# Altium PCB TAUV-Regulated_Power_board.PcbDoc (part 1 of 2)
Units mil, origin at the board's own origin, x right, y up, seen from the top; angles counter-clockwise.
Board outline 4762.5 x 3417.5 mil, 6 copper layers (1-Top, 2-GND1, 3-Signal1, 4-Hi_PWR, 5-GND2, 6-Bottom), stack 32.112 mil thick; 171 components, 113 nets, 521 pads, 65 vias.
Unrouted connection lines stored in the file: 296.
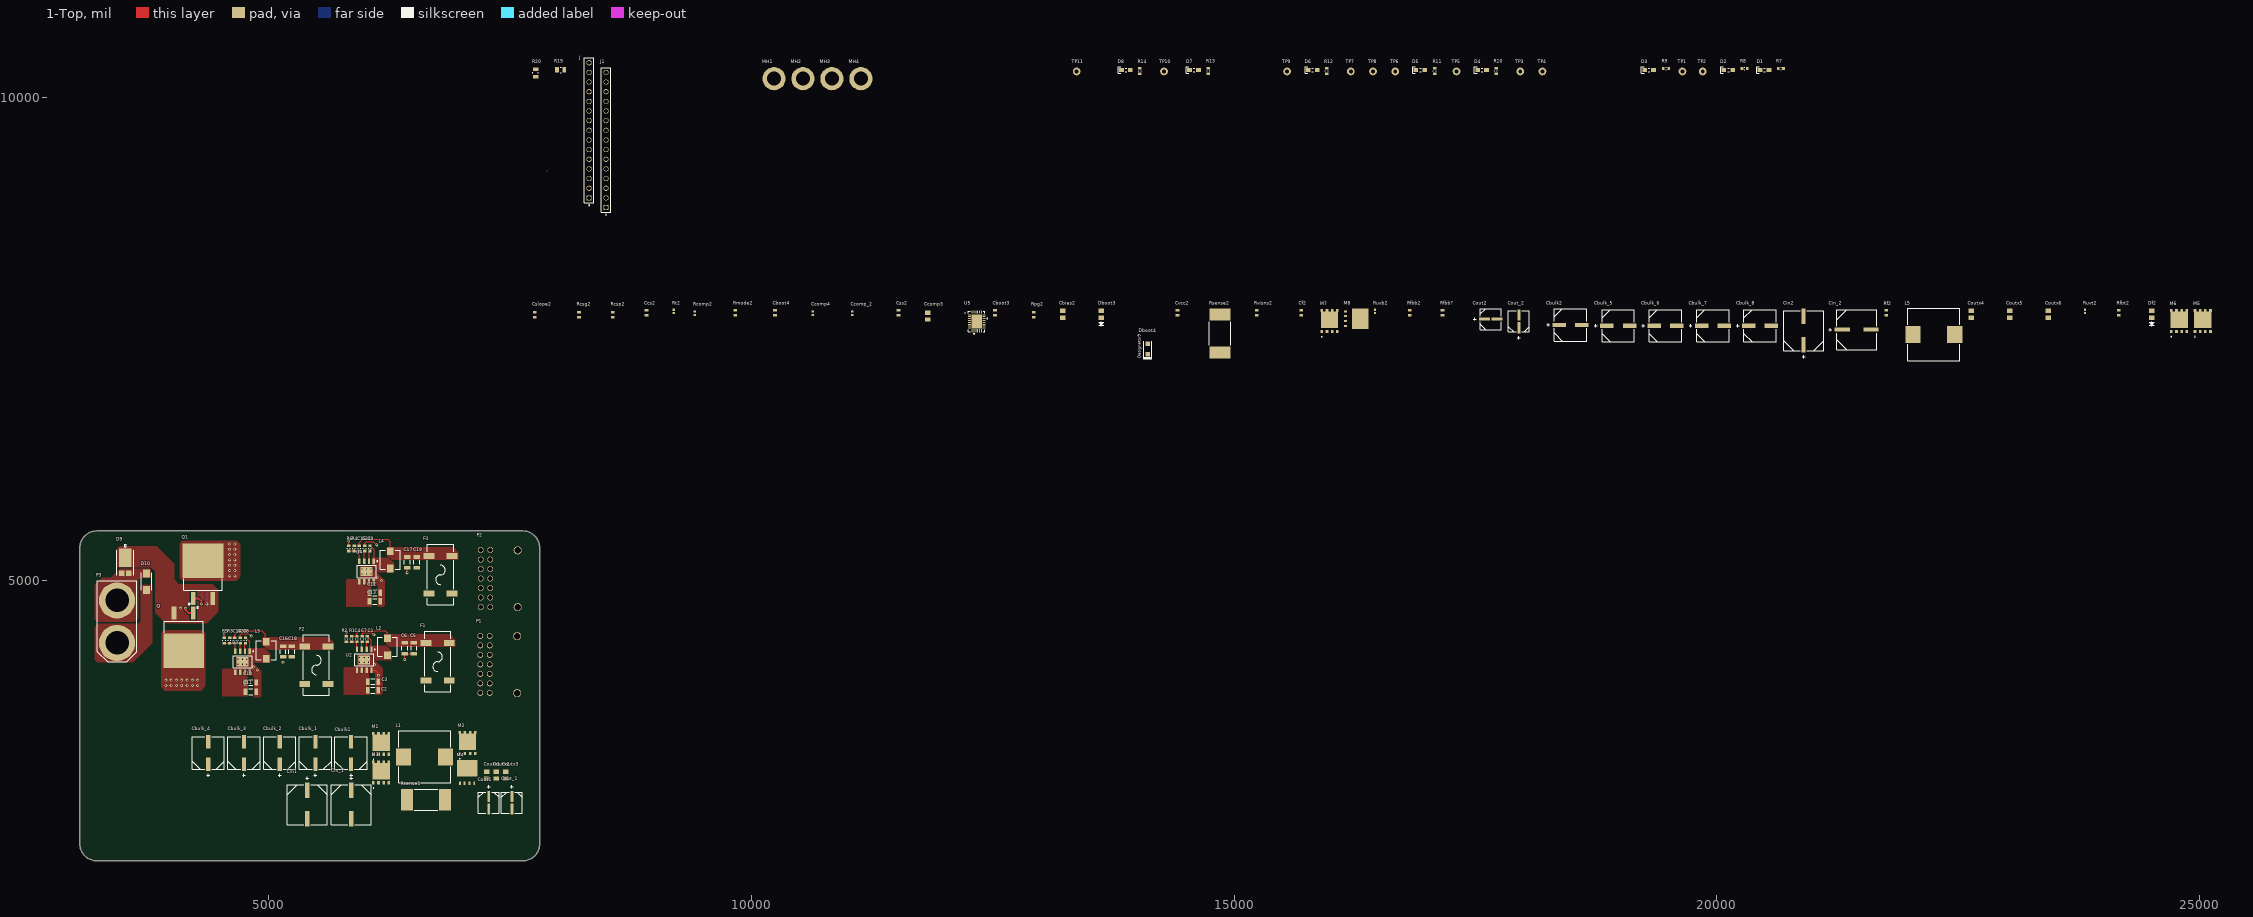
[diagram p0: 1-Top view]
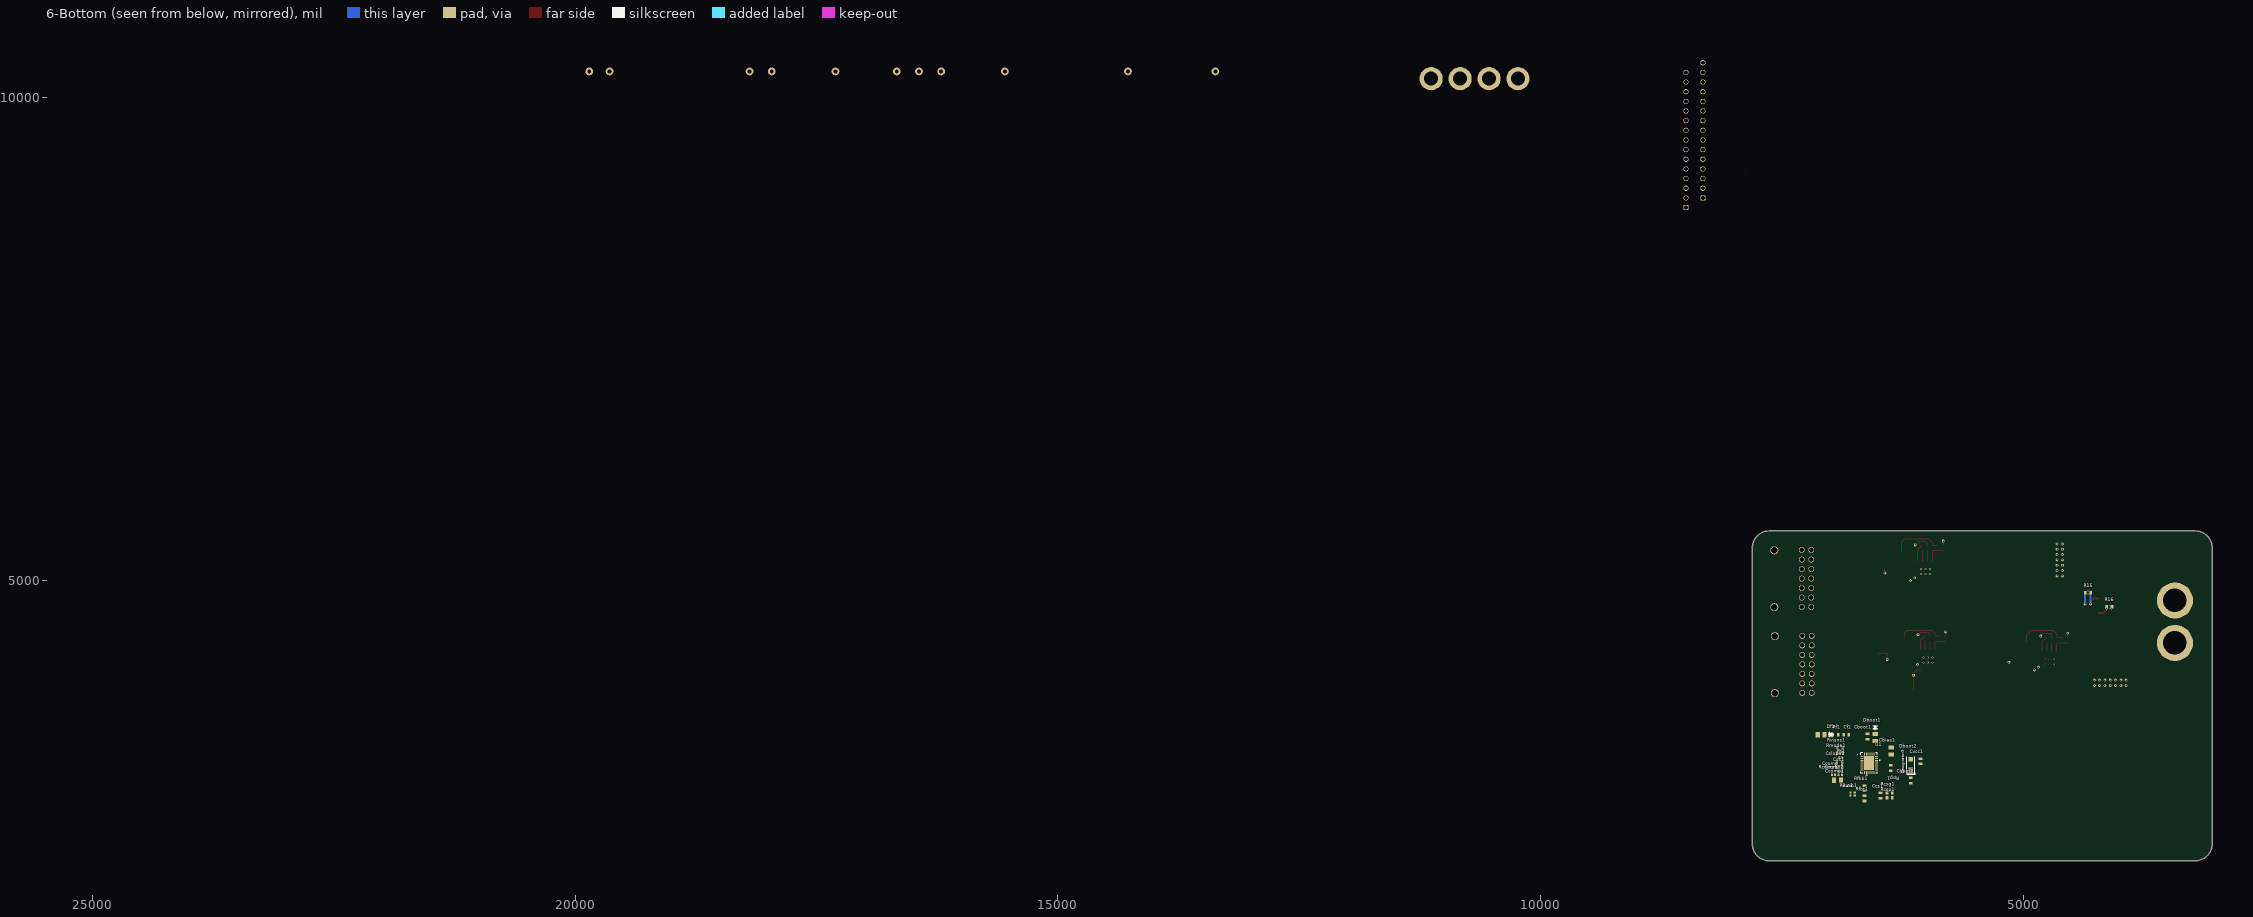
[diagram p1: 6-Bottom view, seen from below]
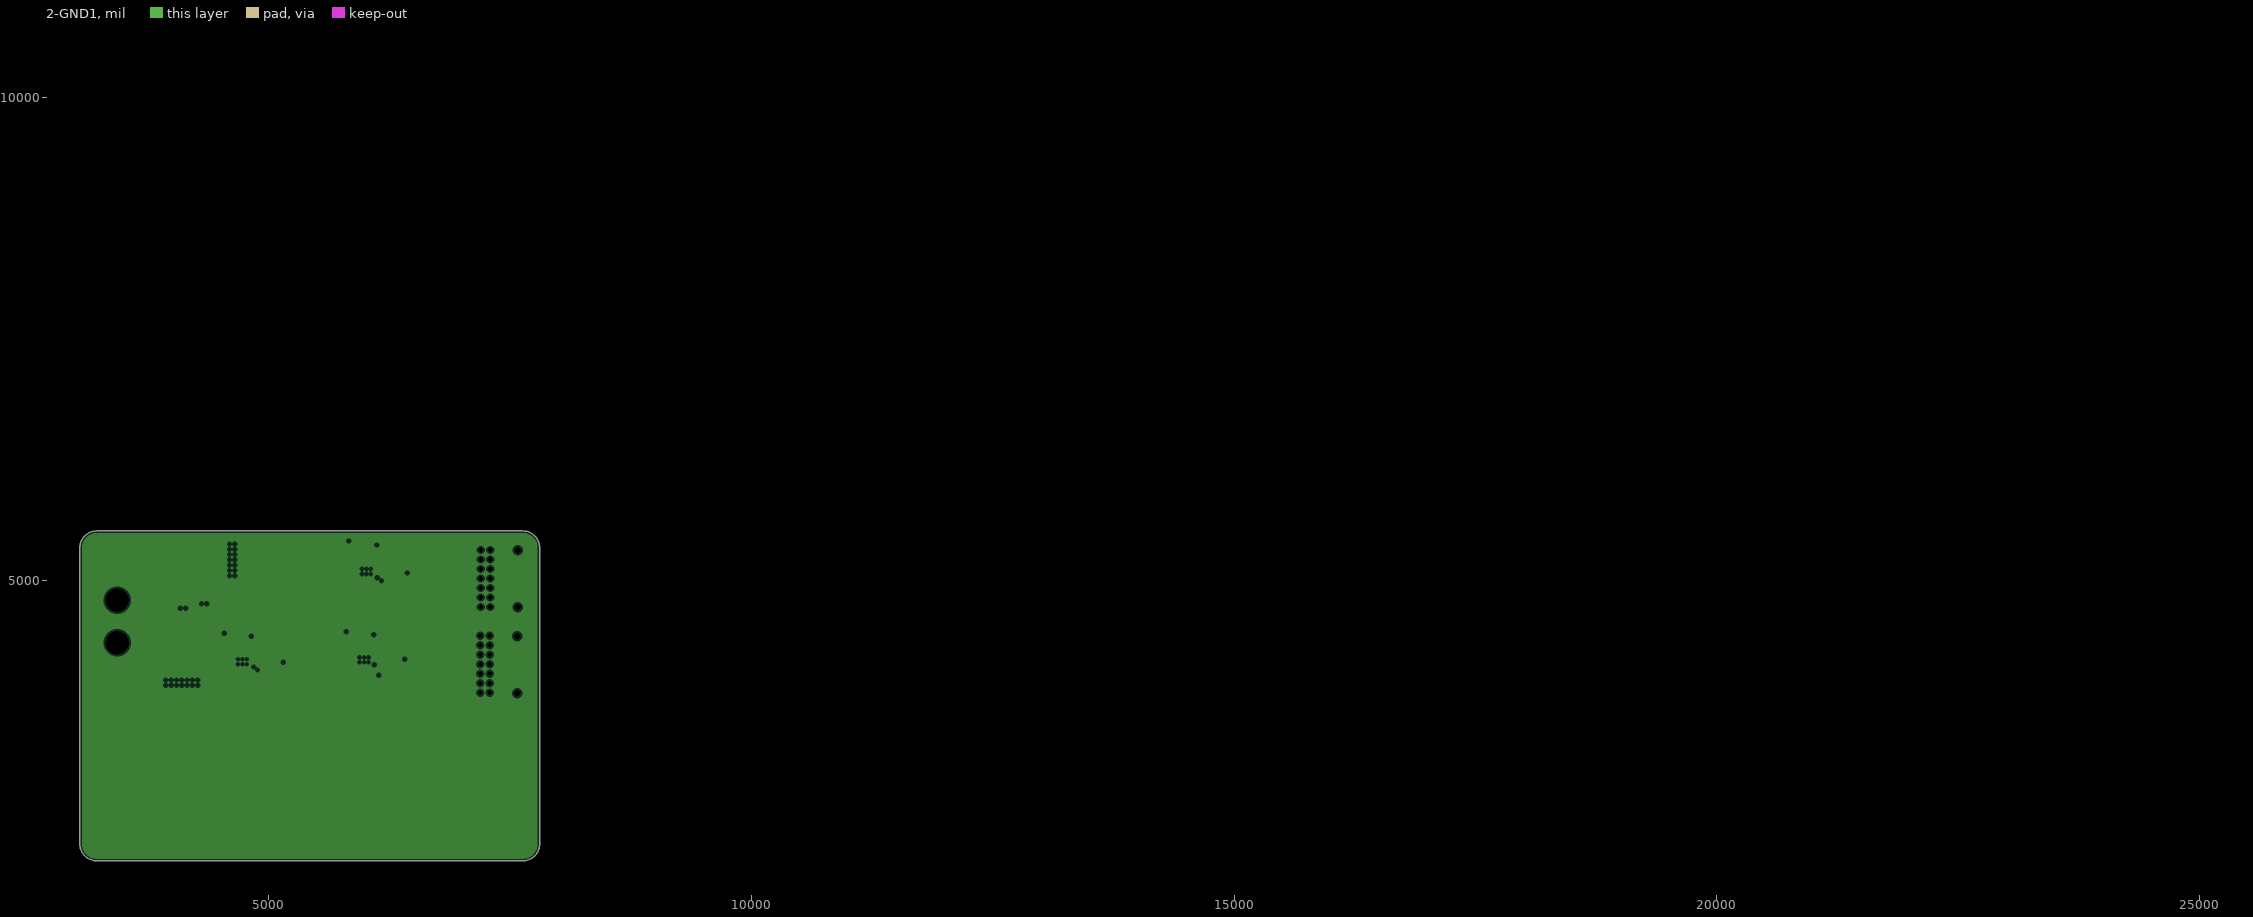
[diagram p2: 2-GND1, clearances drawn from the general rule]
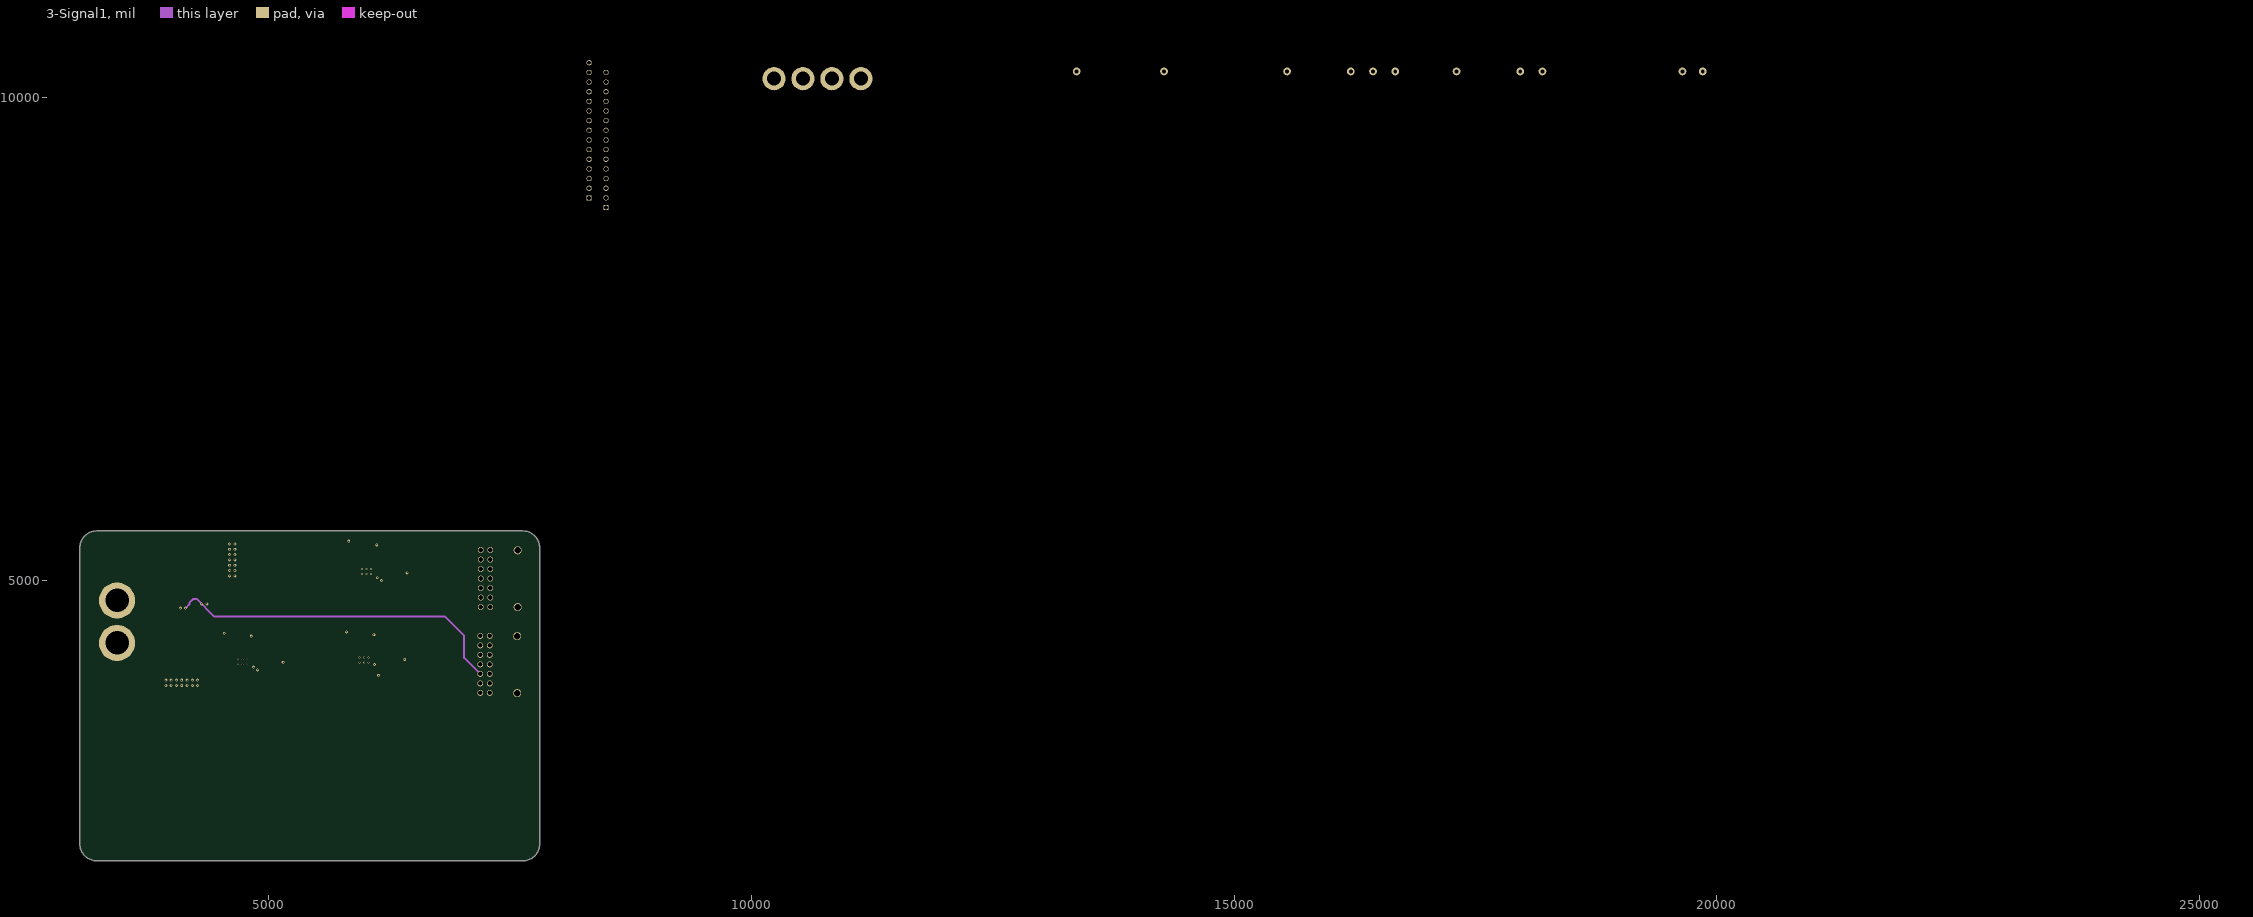
[diagram p3: 3-Signal1]
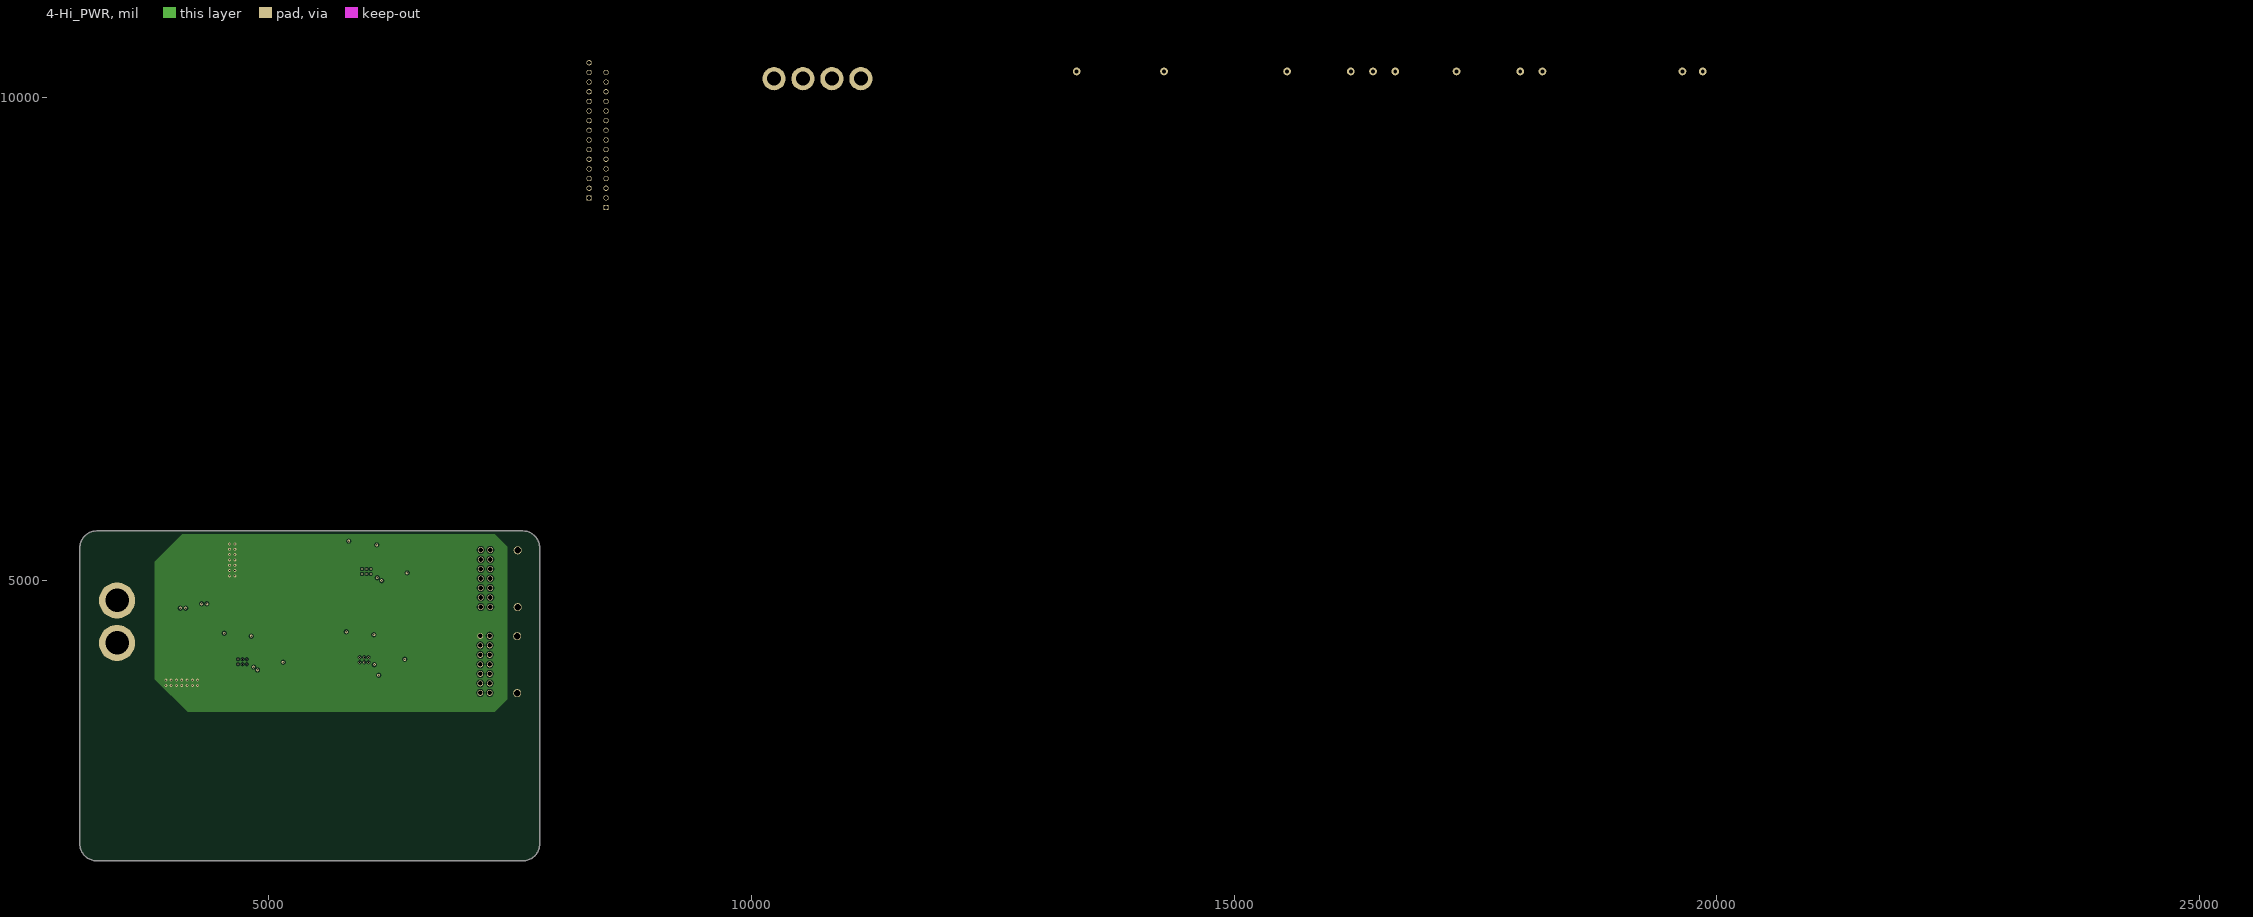
[diagram p4: 4-Hi_PWR]
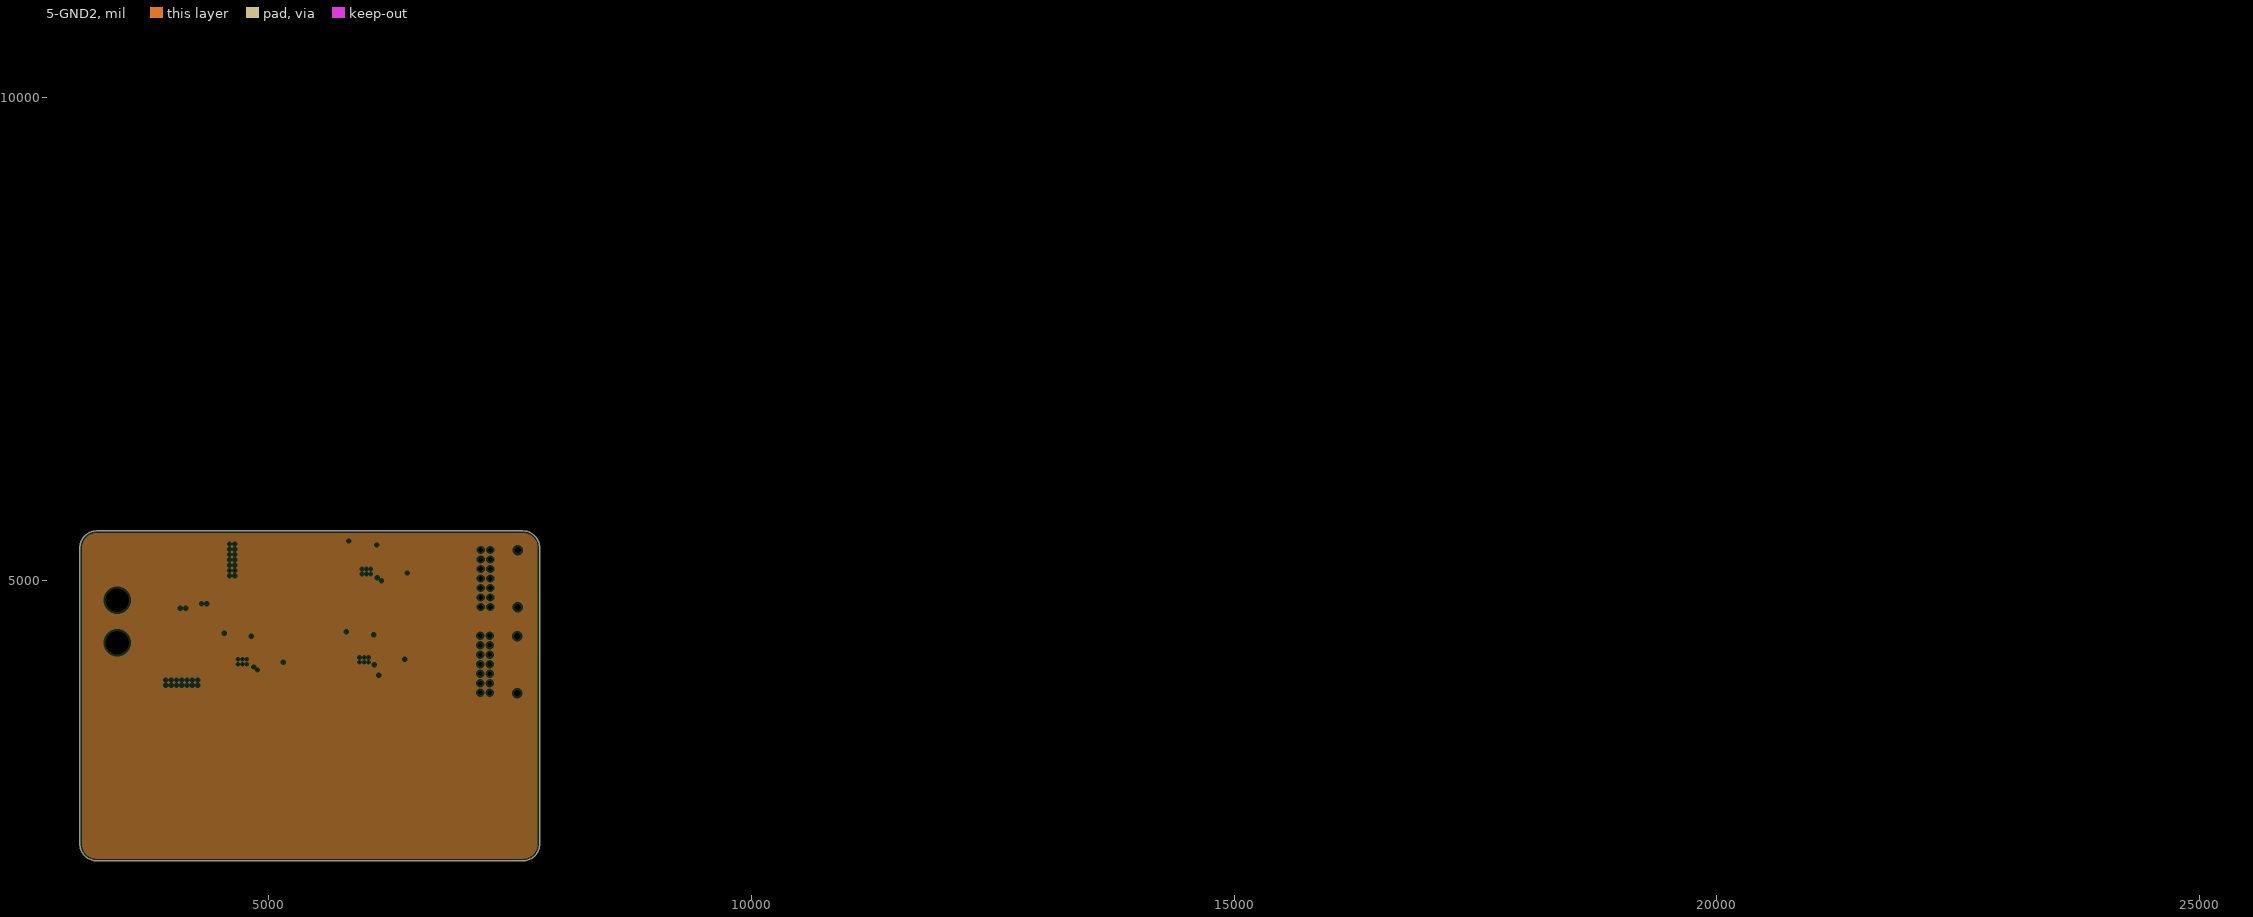
[diagram p5: 5-GND2, clearances drawn from the general rule]

## Layer stack, top to bottom
Top Solder: solder mask 0.4, Solder Resist, Dk 3.5
1-Top: signal copper 1.4
Dielectric 4: prepreg 2.8, PP-006, Dk 4.1
2-GND1: plane copper 1.378
Dielectric 2: prepreg 2.8, PP-006, Dk 4.1
3-Signal1: signal copper 1.378
Dielectric 1: dielectric 12.6, FR-4, Dk 4.8
4-Hi_PWR: signal copper 1.378
Dielectric 3: prepreg 2.8, PP-006, Dk 4.1
5-GND2: plane copper 1.378
Dielectric 5: prepreg 2.8, PP-006, Dk 4.1
6-Bottom: signal copper 1.4
Bottom Solder: solder mask 0.4, Solder Resist, Dk 3.5

## Board outline
3045,2267.5 3045,5335 cw(c3220,5335) 3220,5510 7632.5,5510 cw(c7632.5,5335) 7807.5,5335 7807.5,2267.5 cw(c7632.5,2267.5) 7632.5,2092.5 3220,2092.5 cw(c3220,2267.5)

## Design rules (kind name [scope] priority, off if disabled: settings)
Clearance [All] p1: gap=10 ignorepadtopadclearanceinfootprint=FALSE except(0: Arc-Hole Track-Hole SMDPad-Hole THPad-Hole Via-Hole Fill-Hole Poly-Hole Region-Hole Text-Hole)
PlaneClearance [All] p1: clearance=20
PlaneConnect [All] p1: planeconnectstyle=Relief reliefexpansion=20 reliefentries=4 reliefconductorwidth=10 reliefairgap=10
PolygonConnect [All] p1: connectstyle=Direct reliefconductorwidth=10 reliefentries=4 polygonreliefangle="90 Angle" airgapwidth=10
RoutingVias [All] p1: holewidth=28 width=50 viastyle="Through Hole" minholewidth=28 minwidth=50 maxholewidth=28 maxwidth=50
SolderMaskExpansion [All] p1: expansion=4 istentingtop=FALSE
Width [All] p1: maxlimit=100 minlimit=5 preferedwidth=10
28 further rules are at their usual default settings.

## Classes and differential pairs
component class Sht5-V12P0_Jetson: Cbias1 Cboot1 Cboot2 Cbulk1 Cbulk_1 Cbulk_2 Cbulk_3 Cbulk_4 Ccomp1 Ccomp2 Ccomp_1 Ccs1 Cf1 Cin1 Cin_1 Cout1 Cout_1 Coutx1 Coutx2 Coutx3 Cslope1 Css1 Cvcc1 Dboot1 Dboot2 Df1 L1 M1 M2 M3 M4 Rcomp1 Rcsg1 Rcsp1 Rf1 Rfbb1 Rfbt1 Rmode1 Rpg1 Rsense1 Rt1 Ruvb1 Ruvt1 Rvisns1 U1
net class Sht3-Regulators_Nets: GND NetC1_1 NetC1_2 NetC4_1 NetC4_2 NetC7_2 NetC8_1 NetC8_2 NetC9_1 NetC9_2 NetC14_1 NetC14_2 NetC15_1 NetC15_2 NetC20_2 NetC21_2 V3P3 V5P0 V5P0_Servo VCC_BATT_FILT
net class U5_Nets: 11 26 27 32 33 34 GND NetCbias2_1 NetCboot3_1 NetCboot4_1 NetCcomp3_1 NetCcs2_1 NetCcs2_2 NetCf2_1 NetCslope2_1 NetCss2_1 NetCvcc2_1 NetRfbb2_1 NetRmode2_1 NetRpg2_2 NetRt2_1 NetRuvb2_1 NetRvisns2_1 V12P0
net class U4_Nets: GND NetC9_1 NetC9_2 NetC15_1 NetC21_2 VCC_BATT_FILT
net class U3_Nets: GND NetC8_1 NetC8_2 NetC14_1 NetC20_2 VCC_BATT_FILT
net class U2_Nets: GND NetC1_1 NetC1_2 NetC4_1 NetC7_2 VCC_BATT_FILT
net class U1_Nets: 11_0 26_0 27_0 32_0 33_0 34_0 GND NetCbias1_1 NetCboot1_1 NetCboot2_1 NetCcomp1_1 NetCcs1_1 NetCcs1_2 NetCf1_1 NetCslope1_1 NetCss1_1 NetCvcc1_1 NetRfbb1_1 NetRmode1_1 NetRpg1_2 NetRt1_1 NetRuvb1_1 NetRvisns1_1 V12P0_Jetson
net class TP11_Nets: V3P3
net class TP10_Nets: V5P0_Servo
net class TP9_Nets: V5P0
net class TP8_Nets: Ard_A4/SDA
net class TP7_Nets: Ard_A5/SCL
net class TP6_Nets: V12P0
net class TP5_Nets: V12P0_Jetson
net class TP4_Nets: VBAT_THRUSTERS
net class TP3_Nets: GND
net class TP2_Nets: VCC_BATT_FILT
net class TP1_Nets: GND
net class Rvisns2_Nets: NetRvisns2_1 VBATT
net class Rvisns1_Nets: NetRvisns1_1 VBATT
net class Ruvt2_Nets: NetRuvb2_1 VBATT
net class Ruvt1_Nets: NetRuvb1_1 VBATT
net class Ruvb2_Nets: GND NetRuvb2_1
net class Ruvb1_Nets: GND NetRuvb1_1
net class Rt2_Nets: GND NetRt2_1
net class Rt1_Nets: GND NetRt1_1
net class Rsense2_Nets: 15 GND
net class Rsense1_Nets: 15_0 GND
net class Rpg2_Nets: NetCvcc2_1 NetRpg2_2
net class Rpg1_Nets: NetCvcc1_1 NetRpg1_2
net class Rmode2_Nets: GND NetRmode2_1
net class Rmode1_Nets: GND NetRmode1_1
net class Rfbt2_Nets: NetRfbb2_1 V12P0
net class Rfbt1_Nets: NetRfbb1_1 V12P0_Jetson
net class Rfbb?_Nets: GND NetRfbb2_1
net class Rfbb2_Nets: GND NetRfbb2_1
net class Rfbb1_Nets: GND NetRfbb1_1
net class Rf2_Nets: NetCf2_1 NetDf2_1
net class Rf1_Nets: NetCf1_1 NetDf1_1
net class Rcsp2_Nets: 15 NetCcs2_1
net class Rcsp1_Nets: 15_0 NetCcs1_1
net class Rcsg2_Nets: GND NetCcs2_2
net class Rcsg1_Nets: GND NetCcs1_2
net class Rcomp2_Nets: GND NetCcomp4_2
net class Rcomp1_Nets: GND NetCcomp2_2
net class R20_Nets: Ard_A7 GND
net class R19_Nets: Ard_A7 VBAT
net class R16_Nets: NetD9_2 NetP1_5
net class R15_Nets: NetD9_2 NetP1_5
net class R14_Nets: NetD8_2 V3P3
net class R13_Nets: NetD7_2 V5P0_Servo
net class R12_Nets: NetD6_2 V5P0
net class R11_Nets: NetD5_2 V12P0
net class R10_Nets: NetD4_2 V12P0_Jetson
net class R9_Nets: NetD3_2 VBAT_THRUSTERS
net class R8_Nets: NetD2_2 VCC_BATT_FILT
net class R7_Nets: NetD1_2 VBAT_EXT
net class R6_Nets: GND NetC15_1
net class R5_Nets: GND NetC14_1
net class R4_Nets: NetC15_1 NetC15_2
net class R3_Nets: NetC14_1 NetC14_2
net class R2_Nets: GND NetC4_1
net class R1_Nets: NetC4_1 NetC4_2
net class Q_Nets: NetD9_2 NetP1_5 VCC_BATT_FILT
net class Q1_Nets: NetD9_2 NetP1_5 VCC_BATT_FILT
net class P3_Nets: GND VBAT
net class P2_Nets: GND V3P3 V5P0 V5P0_Servo V12P0 V12P0_Jetson
net class P1_Nets: Ard_A4/SDA Ard_A5/SCL GND NetP1_5 NetP1_10 NetP1_11 V3P3 VBAT_THRUSTERS VCC_BATT_FILT
net class MH4_Nets: GND
net class MH3_Nets: GND
net class MH2_Nets: GND
net class MH1_Nets: GND
net class M8_Nets: 11 15 27
net class M7_Nets: 15 26 32
net class M6_Nets: 11 34 V12P0
net class M5_Nets: 26 33 VBATT
net class M4_Nets: 11_0 15_0 27_0
net class M3_Nets: 15_0 26_0 32_0
net class M2_Nets: 11_0 34_0 V12P0_Jetson
net class M1_Nets: 26_0 33_0 VBATT
net class L5_Nets: 11 26
net class L4_Nets: NetC9_1 NetC15_2
net class L3_Nets: NetC8_1 NetC14_2
net class L2_Nets: NetC1_1 NetC4_2
net class L1_Nets: 11_0 26_0
net class J_Nets: Ard_3V3 Ard_5V Ard_A0 Ard_A1 Ard_A2 Ard_A3 Ard_A4/SDA Ard_A5/SCL Ard_A6 Ard_A7 Ard_D13 Ard_RESET V12P0
net class J1_Nets: Ard_D0/RX Ard_D1/TX Ard_D2 Ard_D3 Ard_D4 Ard_D5 Ard_D6 Ard_D7 Ard_D8 Ard_D9 Ard_D10 Ard_D11 Ard_D12 Ard_RESET GND
net class F3_Nets: NetC15_2 V5P0
net class F2_Nets: NetC14_2 V5P0_Servo
net class F1_Nets: NetC4_2 V3P3
net class Df2_Nets: NetDf2_1 VBATT
net class Df1_Nets: NetDf1_1 VBATT
net class Dboot4_Nets: NetCboot4_1 NetCvcc2_1
net class Dboot3_Nets: NetCboot3_1 NetCvcc2_1
net class Dboot2_Nets: NetCboot2_1 NetCvcc1_1
net class Dboot1_Nets: NetCboot1_1 NetCvcc1_1
net class D10_Nets: GND VBAT
net class D9_Nets: NetD9_2 VBAT
net class D8_Nets: GND NetD8_2
net class D7_Nets: GND NetD7_2
net class D6_Nets: GND NetD6_2
net class D5_Nets: GND NetD5_2
net class D4_Nets: GND NetD4_2
net class D3_Nets: GND NetD3_2
net class D2_Nets: GND NetD2_2
net class D1_Nets: GND NetD1_2
net class Cvcc2_Nets: GND NetCvcc2_1
net class Cvcc1_Nets: GND NetCvcc1_1
net class Css2_Nets: GND NetCss2_1
net class Css1_Nets: GND NetCss1_1
net class Cslope2_Nets: GND NetCslope2_1
net class Cslope1_Nets: GND NetCslope1_1
net class Coutx6_Nets: GND V12P0
net class Coutx5_Nets: GND V12P0
net class Coutx4_Nets: GND V12P0
net class Coutx3_Nets: GND V12P0_Jetson
net class Coutx2_Nets: GND V12P0_Jetson
net class Coutx1_Nets: GND V12P0_Jetson
net class Cout_2_Nets: GND V12P0
net class Cout_1_Nets: GND V12P0_Jetson
net class Cout2_Nets: GND V12P0
net class Cout1_Nets: GND V12P0_Jetson
net class Cin_2_Nets: GND VBATT
net class Cin_1_Nets: GND VBATT
net class Cin2_Nets: GND VBATT
net class Cin1_Nets: GND VBATT
net class Cf2_Nets: GND NetCf2_1
net class Cf1_Nets: GND NetCf1_1
net class Ccs2_Nets: NetCcs2_1 NetCcs2_2
net class Ccs1_Nets: NetCcs1_1 NetCcs1_2
net class Ccomp_2_Nets: NetCcomp3_1 NetCcomp4_2
net class Ccomp_1_Nets: NetCcomp1_1 NetCcomp2_2
net class Ccomp4_Nets: NetCcomp3_1 NetCcomp4_2
net class Ccomp3_Nets: GND NetCcomp3_1
net class Ccomp2_Nets: NetCcomp1_1 NetCcomp2_2
net class Ccomp1_Nets: GND NetCcomp1_1
net class Cbulk_8_Nets: GND VBATT
net class Cbulk_7_Nets: GND VBATT
net class Cbulk_6_Nets: GND VBATT
net class Cbulk_5_Nets: GND VBATT
net class Cbulk_4_Nets: GND VBATT
net class Cbulk_3_Nets: GND VBATT
net class Cbulk_2_Nets: GND VBATT
net class Cbulk_1_Nets: GND VBATT
net class Cbulk2_Nets: GND VBATT
net class Cbulk1_Nets: GND VBATT
net class Cboot4_Nets: 11 NetCboot4_1
net class Cboot3_Nets: 26 NetCboot3_1
net class Cboot2_Nets: 11_0 NetCboot2_1
net class Cboot1_Nets: 26_0 NetCboot1_1
net class Cbias2_Nets: GND NetCbias2_1
net class Cbias1_Nets: GND NetCbias1_1
net class C21_Nets: GND NetC21_2
net class C20_Nets: GND NetC20_2
net class C19_Nets: GND NetC15_2
net class C18_Nets: GND NetC14_2
net class C17_Nets: GND NetC15_2
net class C16_Nets: GND NetC14_2
net class C15_Nets: NetC15_1 NetC15_2
net class C14_Nets: NetC14_1 NetC14_2
net class C13_Nets: GND VCC_BATT_FILT
net class C12_Nets: GND VCC_BATT_FILT
net class C11_Nets: GND VCC_BATT_FILT
net class C10_Nets: GND VCC_BATT_FILT
net class C9_Nets: NetC9_1 NetC9_2
net class C8_Nets: NetC8_1 NetC8_2
net class C7_Nets: GND NetC7_2
net class C6_Nets: GND NetC4_2
net class C5_Nets: GND NetC4_2
net class C4_Nets: NetC4_1 NetC4_2
net class C3_Nets: GND VCC_BATT_FILT
net class C2_Nets: GND VCC_BATT_FILT
net class C1_Nets: NetC1_1 NetC1_2
component class Sht3-Regulators: C1 C2 C3 C4 C5 C6 C7 C8 C9 C10 C11 C12 C13 C14 C15 C16 C17 C18 C19 C20 C21 F1 F2 F3 L2 L3 L4 R1 R2 R3 R4 R5 R6 U2 U3 U4
component class Sht4-Interfaces: D1 D2 D3 D4 D5 D6 D7 D8 D9 D10 J J1 MH1 MH2 MH3 MH4 P1 P2 P3 Q Q1 R7 R8 R9 R10 R11 R12 R13 R14 R15 R16 R19 R20 TP1 TP2 TP3 TP4 TP5 TP6 TP7 TP8 TP9 TP10 TP11
component class Sht2-V12P0: Cbias2 Cboot3 Cboot4 Cbulk2 Cbulk_5 Cbulk_6 Cbulk_7 Cbulk_8 Ccomp3 Ccomp4 Ccomp_2 Ccs2 Cf2 Cin2 Cin_2 Cout2 Cout_2 Coutx4 Coutx5 Coutx6 Cslope2 Css2 Cvcc2 Dboot3 Dboot4 Df2 L5 M5 M6 M7 M8 Rcomp2 Rcsg2 Rcsp2 Rf2 Rfbb2 Rfbb? Rfbt2 Rmode2 Rpg2 Rsense2 Rt2 Ruvb2 Ruvt2 Rvisns2 U5

## Components (designator, comment, footprint, x,y, rotation, side; value= is the part's Value field where it differs from the comment)
C1 "100nF" CAPC0603(1608)100_L 6020,4390 r270 top locked
C2 "4.7uF" CAPC1206(3216)190_L 6080,3860 r180 top locked
C3 "4.7uF" CAPC1206(3216)190_L 6080,3950 r180 top locked
C4 "75pF" CAPC0603(1608)100_L 5915,4390 r90 top locked
C5 "4.7uF" CAPC1206(3216)190_L 6505,4295 r90 top locked
C6 "47uF" CAPC1206(3216)190_L 6410,4295 r90 top locked
C7 "1uF 25V" CAPC0603(1608)100_L 5970,4390 r270 top locked value=1uF
C8 "100nF" CAPC0603(1608)100_L 4760,4375 r270 top locked
C9 "100nF" CAPC0603(1608)100_L 6050,5330 r270 top locked
C10 "4.7uF" CAPC1206(3216)190_L 4815,3940 r180 top locked
C11 "4.7uF" CAPC1206(3216)190_L 4815,3845 r180 top locked
C12 "4.7uF" CAPC1206(3216)190_L 6100,4870 r180 top locked
C13 "4.7uF" CAPC1206(3216)190_L 6100,4780 r180 top locked
C14 "30pF" CAPC0603(1608)100_L 4650,4375 r90 top locked
C15 "30pF" CAPC0603(1608)100_L 5940,5330 r90 top locked
C16 "4.7uF" CAPC1206(3216)190_L 5150,4260.12 r90 top locked
C17 "4.7uF" CAPC1206(3216)190_L 6435,5185 r90 top locked
C18 "47uF" CAPC1206(3216)190_L 5240,4260 r90 top locked
C19 "47uF" CAPC1206(3216)190_L 6535,5185 r90 top locked
C20 "1uF 25V" CAPC0603(1608)100_L 4705,4375 r270 top locked value=1uF
C21 "1uF 25V" CAPC0603(1608)100_L 5995,5330 r270 top locked value=1uF
Cbias1 "08053C104KAT2A" 0805 6370,3230 r90 bottom value=100nF
Cbias2 "08053C104KAT2A" 0805 13225,7755 r90 top value=100nF
Cboot1 "06033C104KAT2A" 0603 6615,3380 r270 bottom value=100nF
Cboot2 "06033C104KAT2A" 0603 6165,2925 r270 bottom value=100nF
Cboot3 "06033C104KAT2A" 0603 12525,7770 r90 top value=100nF
Cboot4 "06033C104KAT2A" 0603 10245,7770 r90 top value=100nF
Cbulk1 "100SXV15M" CAPSMT_62_E12 5854.5,3210 r90 top value=15uF
Cbulk2 "100SXV15M" CAPSMT_62_E12 18485,7645 r0 top value=15uF
Cbulk_1 "100SXV15M" CAPSMT_62_E12 5484.5,3210 r90 top value=15uF
Cbulk_2 "100SXV15M" CAPSMT_62_E12 5114.5,3210 r90 top value=15uF
Cbulk_3 "100SXV15M" CAPSMT_62_E12 4744.5,3210 r90 top value=15uF
Cbulk_4 "100SXV15M" CAPSMT_62_E12 4374.5,3210 r90 top value=15uF
Cbulk_5 "100SXV15M" CAPSMT_62_E12 18980,7635 r0 top value=15uF
Cbulk_6 "100SXV15M" CAPSMT_62_E12 19470,7635 r0 top value=15uF
Cbulk_7 "100SXV15M" CAPSMT_62_E12 19960,7635 r0 top value=15uF
Cbulk_8 "100SXV15M" CAPSMT_62_E12 20450,7635 r0 top value=15uF
Ccomp1 "C0805C181K5GACTU" 0805 6925,2925 r0 bottom value=180pF
Ccomp2 "CGA2B3X7R1H103K050BB" 0402 6896.5,2985 r0 bottom value=10nF
Ccomp3 "C0805C181K5GACTU" 0805 11825,7735 r90 top value=180pF
Ccomp4 "CGA2B3X7R1H103K050BB" 0402 10635,7765 r90 top value=10nF
Ccomp_1 "CGA2B3X7R1H103K050BB" 0402 6896.5,3020 r0 bottom value=10nF
Ccomp_2 "CGA2B3X7R1H103K050BB" 0402 11045,7765 r90 top value=10nF
Ccs1 "06035A470JAT2A" 0603 6480,2770 r90 bottom value=47pF
Ccs2 "06035A470JAT2A" 0603 8915,7770 r90 top value=47pF
Cf1 "CGA3E2X7R1H104K080AA" 0603 6835,3400 r0 bottom value=100nF
Cf2 "CGA3E2X7R1H104K080AA" 0603 15695,7770 r90 top value=100nF
Cin1 "EEHZA1K330P" SM_RADIAL_10BMM 5400,2675 r270 top value="33 uF"
Cin2 "" SM_RADIAL_10BMM 20900,7585 r90 top value=33uF
Cin_1 "EEHZA1K330P" SM_RADIAL_10BMM 5855,2675 r270 top value=33uF
Cin_2 "EEHZA1K330P" SM_RADIAL_10BMM 21450,7595 r0 top value=33uF
Cout1 "16SVPF82M" CAPSMT_62_E61 7280,2694.75 r270 top value=82uF
Cout2 "16SVPF82M" CAPSMT_62_E61 17660,7705 r0 top value=82uF
Cout_1 "16SVPF82M" CAPSMT_62_E61 7520,2695 r270 top value=82uF
Cout_2 "16SVPF82M" CAPSMT_62_E61 17950,7680 r90 top value=82uF
Coutx1 "C2012X5R1V226M125AC" 0805 7258,2980 r90 top value=22uF
Coutx2 "C2012X5R1V226M125AC" 0805 7358,2980 r90 top value=22uF
Coutx3 "C2012X5R1V226M125AC" 0805 7455,2980 r90 top value=22uF
Coutx4 "C2012X5R1V226M125AC" 0805 22635,7755 r90 top value=22uF
Coutx5 "C2012X5R1V226M125AC" 0805 23035,7755 r90 top value=22uF
Coutx6 "C2012X5R1V226M125AC" 0805 23435,7755 r90 top value=22uF
Cslope1 "CL10C221JB8NNNC" 0603 6905,3115 r0 bottom value=220pF
Cslope2 "CL10C221JB8NNNC" 0603 7755,7750 r90 top value=220pF
Css1 "C0603C153J3GACTU" 0603 6905,3065 r0 bottom value=15nF
Css2 "C0603C153J3GACTU" 0603 11525,7770 r90 top value=15nF
Cvcc1 "EMK107B7105KA-T" 0603 6065,3125 r270 bottom value=1uF
Cvcc2 "EMK107B7105KA-T" 0603 14415,7770 r90 top value=1uF
D1 "LED GREEN" LED_0805 20495,10285 r0 top
D2 "LED GREEN" LED_0805 20120,10285 r0 top
D3 "LED GREEN" LED_0805 19300,10285 r0 top
D4 "LED GREEN" LED_0805 17570,10285 r0 top
D5 "LED GREEN" LED_0805 16930,10285 r0 top
D6 "LED GREEN" LED_0805 15815,10285 r0 top
D7 "LED GREEN" LED_0805 14585,10285 r0 top
D8 "LED GREEN" LED_0805 13880,10285 r0 top
D9 "SBRT15U50SP5-13" SBRT15U50SP5-13 3515,5230 r0 top
D10 "SMAJ30CA" LFUS-DO-214AC-A-2_V 3735,4985 r270 top
Dboot1 "GENERIC_DIODE" GEN_Diode 6535,3370 r270 bottom value=500mV
Dboot2 "CDBK0520L-HF" SOD-123F 6165,3090 r90 bottom value=385mV
Dboot3 "GENERIC_DIODE" GEN_Diode 13625,7755 r90 top value=500mV
Dboot4 "CDBK0520L-HF" SOD-123F 14105,7395 r90 top value=385mV
Df1 "GENERIC_DIODE" GEN_Diode 7095,3400 r0 bottom value=500mV
Df2 "GENERIC_DIODE" GEN_Diode 24505,7755 r90 top value=500mV
F1 "Fuse Holder 3588" "Fuse Holder 3588" 6750,4155 r270 top locked
F2 "Fuse Holder 3588" "Fuse Holder 3588" 5495,4120 r270 top locked
F3 "Fuse Holder 3588" "Fuse Holder 3588" 6780,5055 r270 top locked
J "TSW-115-05-G-S" SAMTEC_TSW-115-05-G-S 8320,8960 r90 top
J1 "TSW-115-05-G-S" SAMTEC_TSW-115-05-G-S 8495,8860 r90 top
L1 "SRP1270-3R3M" SRP1270 6615,3170 r0 top value=3.3uH
L2 "6.8uH" "BOURNS SRP5030T" 6230,4310 r90 top locked
L3 "SRP6540-8R2M" "BOURNS SRP5030T" 4975,4275 r90 top locked
L4 "SRP6540-8R2M" "BOURNS SRP5030T" 6260,5210 r90 top locked
L5 "SRP1270-3R3M" SRP1270 22250,7545 r0 top value=3.3uH
M1 "CSD19534Q5A" TRANS_NexFET_Q5A 6165,3305 r90 top value=100V
M2 "CSD17303Q5" TRANS_NexFET_Q5 7060,3313.19 r90 top value=30V
M3 "CSD19534Q5A" TRANS_NexFET_Q5A 6165,3010 r90 top value=100V
M4 "CSD17573Q5B" DNK0008A 7055,3007.48 r90 top value=30V
M5 "CSD19534Q5A" TRANS_NexFET_Q5A 25035,7685 r90 top value=100V
M6 "CSD17303Q5" TRANS_NexFET_Q5 24790,7685 r90 top value=30V
M7 "CSD19534Q5A" TRANS_NexFET_Q5A 15990,7685 r90 top value=100V
M8 "CSD17573Q5B" DNK0008A 16265,7710 r0 top value=30V
MH1 "#4-40" "Mounting Hole #4-40" 10235,10195 r0 top
MH2 "#4-40" "Mounting Hole #4-40" 10535,10195 r0 top
MH3 "#4-40" "Mounting Hole #4-40" 10835,10195 r0 top
MH4 "#4-40" "Mounting Hole #4-40" 11135,10195 r0 top
P1 "14-Pin 2-Row Nano-Fit Right Angle" "MOLEX NANO-FIT 2X7 - Right Angle" 7290.55,3831.97 r90 top locked
P2 "14-Pin 2-Row Nano-Fit Right Angle" "MOLEX NANO-FIT 2X7 - Right Angle" 7295.55,4721.97 r90 top locked
P3 "XT90" XT90 3430,4350 r90 top
Q "IRF9Z34STRLPBF" TO254P1521X483-4N 4120,4410 r270 top
Q1 "IRF9Z34STRLPBF" TO254P1521X483-4N 4320,5060 r90 top
R1 "51K 1%" RESC0603(1608)_L 5860,4390 r90 top locked value="51000.00 Ohm"
R2 "22K1 1%" RESC0603(1608)_L 5805,4390 r270 top locked value="22100.00 Ohm"
R3 "88K7 1%" RESC0603(1608)_L 4595,4375 r90 top locked value="88700.00 Ohm"
R4 "88K7 1%" RESC0603(1608)_L 5885,5330 r90 top locked value="88700.00 Ohm"
R5 "22K1 1%" RESC0603(1608)_L 4540,4375 r270 top locked value="22100.00 Ohm"
R6 "22K1 1%" RESC0603(1608)_L 5830,5330 r270 top locked value="22100.00 Ohm"
R7 "1K2" RESC0603(1608)_L 20665,10300 r0 top value="1200.00 Ohm"
R8 "1K2" RESC0603(1608)_L 20290,10300 r0 top value="1200.00 Ohm"
R9 "1K2" RESC0603(1608)_L 19475,10300 r0 top value="1200.00 Ohm"
R10 "681R" RESC0603(1608)_L 17715,10275 r90 top value="681.00 Ohm"
R11 "681R" RESC0603(1608)_L 17080,10275 r90 top value="681.00 Ohm"
R12 "220R" RESC0603(1608)_L 15960,10275 r90 top value="220.00 Ohm"
R13 "220R" RESC0603(1608)_L 14735,10275 r90 top value="220.00 Ohm"
R14 "100R" RESC0603(1608)_L 14025,10275 r90 top value="100.00 Ohm"
R15 "4K7" RESC0603(1608)_L 4330,4870 r0 bottom value="4700.00 Ohm"
R16 "4K7" RESC0603(1608)_L 4110,4725 r180 bottom value="4700.00 Ohm"
R19 "4M70" FP-CRCW0805-e3-MFG 8025,10285 r0 top
R20 "2M00" FP-CRCW0805-e3-MFG 7765,10255 r90 top
Rcomp1 "CRCW040212K7FKED" 0402 6966.5,2985 r0 bottom value=12.7k
Rcomp2 "CRCW040212K7FKED" 0402 9415,7765 r90 top value=12.7k
Rcsg1 "CRCW0603100RFKEA" 0603 6385,2800 r180 bottom value=100
Rcsg2 "CRCW0603100RFKEA" 0603 8215,7750 r90 top value=100
Rcsp1 "CRCW0603100RFKEA" 0603 6385,2745 r180 bottom value=100
Rcsp2 "CRCW0603100RFKEA" 0603 8565,7750 r90 top value=100
Rf1 "RC0603FR-0710RL" 0603 6947.5,3400 r0 bottom value=10
Rf2 "RC0603FR-0710RL" 0603 21755,7770 r90 top value=10
Rfbb1 "RC0603FR-0720KL" 0603 6645,2845 r90 bottom value=20k
Rfbb2 "RC0603FR-0720KL" 0603 16820,7770 r90 top value=20k
Rfbb? "RC0603FR-0720KL" 0603 17160,7770 r90 top value=20k
Rfbt1 "CRCW0603280KFKEA" 0603 6645,2740 r90 bottom value=280k
Rfbt2 "CRCW0603280KFKEA" 0603 24165,7770 r90 top value=280k
Rmode1 "RC0603FR-0793K1L" 0603 6900,3210 r0 bottom value=93.1k
Rmode2 "RC0603FR-0793K1L" 0603 9835,7770 r90 top value=93.1k
Rpg1 "RC0603FR-0710KL" 0603 6375,3055 r270 bottom value=10k
Rpg2 "RC0603FR-0710KL" 0603 12925,7750 r90 top value=10k
Rsense1 "WSR37L000FEA" 4527 6630,2725 r0 top value=7m
Rsense2 "WSR37L000FEA" 4527 14855,7555 r90 top value=7m
Rt1 "CRCW040223K2FKED" 0402 6890,3160 r0 bottom value=23.2k
Rt2 "CRCW040223K2FKED" 0402 9195,7785 r90 top value=23.2k
Ruvb1 "CRCW040271K5FKED" 0402 6745,2785 r270 bottom value=71.5k
Ruvb2 "CRCW040271K5FKED" 0402 16460,7785 r90 top value=71.5k
Ruvt1 "CRCW0402249KFKED" 0402 6790,2785 r90 bottom value=249k
Ruvt2 "CRCW0402249KFKED" 0402 23815,7785 r90 top value=249k
Rvisns1 "CRCW06032K00FKEA" 0603 6900,3265 r0 bottom value=2k
Rvisns2 "CRCW06032K00FKEA" 0603 15235,7770 r90 top value=2k
TP1 "Test Point Loop" "Test Point Loop - Black" 19645,10270 r0 top
TP2 "Test Point Loop" "Test Point Loop - Black" 19855,10270 r0 top
TP3 "Test Point Loop" "Test Point Loop - Black" 17965,10270 r0 top
TP4 "Test Point Loop" "Test Point Loop - Black" 18195,10270 r0 top
TP5 "Test Point Loop" "Test Point Loop - Black" 17305,10270 r0 top
TP6 "Test Point Loop" "Test Point Loop - Black" 16670,10270 r0 top
TP7 "Test Point Loop" "Test Point Loop - Black" 16210,10270 r0 top
TP8 "Test Point Loop" "Test Point Loop - Black" 16440,10270 r0 top
TP9 "Test Point Loop" "Test Point Loop - Black" 15550,10270 r0 top
TP10 "Test Point Loop" "Test Point Loop - Black" 14275,10270 r90 top
TP11 "Test Point Loop" "Test Point Loop - Black" 13370,10270 r90 top
U1 "LM5176RHFT" VQFN_76RHFT_TEX 6597,3105 r180 bottom
U2 "LMR23630-Q1" DDA0008E_N 5990,4175 r270 top locked
U3 "LMR23630-Q1" DDA0008E_N 4730,4155 r270 top locked
U4 "LMR23630-Q1" DDA0008E_N 6015,5090 r270 top locked
U5 "LM5176RHFT" VQFN_76RHFT_TEX 12335,7680 r0 top

## Footprints (in the part's own frame and the unit in brackets; to place one, negate y for a bottom-side part, rotate by r counter-clockwise, add the part's x,y. Pads: shape width x height; smd on the part's side, far side on the other; paste and mask are expansions set on the pad)
0402 [mil]
  rect 22x24 smd: 1(-16.5,0) 2(16.5,0)
  body extent 0,0 10,10, height 10
0603 [mil]
  rect 26x38 smd: 1(-27.5,0) 2(27.5,0)
  body extent 0,0 10,10, height 10
0805 [mil]
  rect 44x57 smd: 1(-35.5,0) 2(35.5,0)
  body extent 0,0 10,10, height 10
4527 [mil]
  rect 124x220 smd: 1(-195.5,0) 2(195.5,0)
  silkscreen extent -120,-110 120,110, body extent 0,0 10,10, height 10
"BOURNS SRP5030T" [mm] "Precision Wire Wound Inductor, 2-Leads, Body 5.70x5.20mm, IPC Medium Density"
  rect 2x1.8 smd: 1(-2.25,0) 2(2.25,0)
  silkscreen extent -2.5,-2.6 2.5,2.6, body extent -2.85,-2.6 2.85,2.6, height 3
CAPC0603(1608)100_L [mm] "Chip Capacitor, Body 1.6x0.8mm, Height 1.0mm, IPC High Density"
  rect 0.7x0.9 smd: 1(-0.7,0) 2(0.7,0)
  silkscreen extent -0.05,-0.35 0.05,0.35, body extent -0.87,-0.47 0.88,0.48, height 1
CAPC1206(3216)190_L [mm] "Chip Capacitor, Body 3.2x1.6mm, Height 1.9mm, IPC High Density"
  rect 0.95x1.7 smd: 1(-1.4,0) 2(1.4,0)
  silkscreen extent -0.55,-0.75 0.55,0.75, body extent -1.7,-0.9 1.7,0.9, height 1.9
CAPSMT_62_E12 [mil]
  rect 140x43 smd: 1(-117,0) 2(117,0)
  silkscreen extent -246,-168 168,168, body extent 0,0 10,10, height 10
CAPSMT_62_E61 [mil]
  rect 115.5x31 smd: 1(-65.25,0) 2(65.25,0)
  silkscreen extent -182,-109 109,109, body extent 0,0 10,10, height 10
DDA0008E_N [mm] "SOP, 8-Leads, Body 4x5mm, Pitch 1.27mm, Thermal Pad 2.4x3.1mm, IPC Medium Density"
  rrect17% 1.45x0.6 smd: 1(-2.725,1.905) 2(-2.725,0.635) 3(-2.725,-0.635) 4(-2.725,-1.905) 5(2.725,-1.905) 6(2.725,-0.635) 7(2.725,0.635) 8(2.725,1.905)
  rrect4% 2.4x3.1 smd: 9(0,0)
  silkscreen extent -2.85,-2.5 1.6,2.88, body extent -2.98,-2.45 2.98,2.45, height 1.5
DNK0008A [mm]
  rect 0.86x0.51 smd paste-0.05 mask-0.051: 1(-2.82,1.905) 2(-2.82,0.635) 3(-2.82,-0.635) 4(-2.82,-1.905) 5(2.82,-1.905) 6(2.82,-0.635) 7(2.82,0.635) 8(2.82,1.905)
  rect 4.34x5.4 smd paste-2.687 mask-2.692: 9(1.08,0)
  body extent 0,0 0.25,0.25, height 0.25
FP-CRCW0805-e3-MFG [mm]
  rect 0.95x1.45 smd paste+0 mask+0: 1(-0.975,0) 2(0.975,0)
  silkscreen extent -0.13,-0.7 0.13,0.7, body extent -1.55,-0.82 1.55,0.82, height 0.25
"Fuse Holder 3588" [mil] "Keystone Electronics 3588 Automotive Blade Fuse Holder, SMT"
  rect 62x111 smd: 1(-195,120) 1(-195,-120) 2(195,120) 2(195,-120)
  silkscreen extent -315,-135 310,135, body extent -316,-173 314,172, height 686
GEN_Diode [mil]
  rect 44x57 smd: 1(-35.5,0) 2(35.5,0)
  silkscreen extent -126,-25 -76,25, body extent 0,0 10,10, height 10
LED_0805 [mm] "Liteon 0805 Chip LED"
  rect 1.25x1.1 smd: 1(-1.175,0) 2(1.175,0)
  silkscreen extent -2.01,-0.8 0.2,0.8, body extent -1,-0.63 1,0.63, height 0.8
LFUS-DO-214AC-A-2_V [mm] "Molded Diode, 2-Leads, Body 4.6x2.79mm"
  rect 2.1x1.8 smd: 1(-2.2,0) 2(2.2,0)
  silkscreen extent -2.3,-1.4 2.3,1.4, body extent -2.52,-1.4 2.52,1.4, height 2.29
"MOLEX NANO-FIT 2X7 - Right Angle" [mm]
  round 1.56 hole 1.2: 1(15,2.5) 2(12.5,2.5) 3(10,2.5) 4(7.5,2.5) 5(5,2.5) 6(2.5,2.5) 7(0,2.5) 8(15,0) 9(12.5,0) 10(10,0) 11(7.5,0) 12(5,0) 13(2.5,0) 14(0,0)
  round 2.1 hole 1.7: ""(-0.05,-7.225) ""(14.925,-7.225)
  body extent -2.68,-26.05 17.53,2.78, height 10.21
"Mounting Hole #4-40" [mm] "Mounting Hole for ANSI #4-40 w/ Flat Washer, Loose Fit"
  round 6.1 hole 3.7: 0(0,0)
RESC0603(1608)_L [mm] "Chip Resistor, Body 1.6x0.8mm, IPC High Density"
  rect 0.7x0.9 smd: 1(-0.7,0) 2(0.7,0)
  silkscreen extent -0.05,-0.35 0.05,0.35, body extent -0.85,-0.47 0.85,0.47, height 0.6
SAMTEC_TSW-115-05-G-S [mm]
  rect 1.37x1.37 hole 1.02: 01(0,0)
  round 1.37 hole 1.02: 02(2.54,0) 03(5.08,0) 04(7.62,0) 05(10.16,0) 06(12.7,0) 07(15.24,0) 08(17.78,0) 09(20.32,0) 10(22.86,0) 11(25.4,0) 12(27.94,0) 13(30.48,0) 14(33.02,0) 15(35.56,0)
  silkscreen extent -2.02,-1.27 36.83,1.27
SBRT15U50SP5-13 [mm]
  rect 1.39x1.4 smd: 1(-0.92,-3.982) 1(0.92,-3.982)
  rect 3.36x4.86 smd: 2(0,0)
  silkscreen extent -2.2,-4.5 2.2,3.52, body extent -2,-4.6 2,2.4, height 1.05
SM_RADIAL_10BMM [mil]
  rect 160x43 smd: 1(-148.5,0) 2(148.5,0)
  silkscreen extent -288,-207 207,207, body extent 0,0 10,10, height 10
SOD-123F [mm]
  rect 1.2x1.2 smd paste-0.05 mask+0.051: 1(-1.4,0) 2(1.4,0)
  silkscreen extent -2.64,-1.12 2.01,1.12, body extent 0,0 0.25,0.25, height 0.25
SRP1270 [mil]
  rect 157.5x177 smd: 1(-216.75,0) 2(216.75,0)
  silkscreen extent -270,-270 270,270, body extent 0,0 10,10, height 10
"Test Point Loop - Black" [mil] ", black"
  round 80 hole 40: 1(0,0)
  body extent -50,-50 50,50, height 180
TO254P1521X483-4N [mil]
  rect 135x49.49 smd: 1(-250,100) 3(-250,-100)
  rect 355x420 smd: 4(140,0)
  silkscreen extent -316,-201 -43,201
TRANS_NexFET_Q5 [mm]
  rect 0.8x0.7 smd paste-0.387: 1(-2.752,2.055) 2(-2.752,0.685) 3(-2.752,-0.685) 4(-2.752,-2.055) 5(2.752,-2.055) 6(2.752,-0.685) 7(2.752,0.685) 8(2.752,2.055)
  rect 4.3x4.56 smd paste-2.267 mask+0.025: 9(0.3,0)
  silkscreen extent -4.22,1.98 -4.07,2.13, body extent 0,0 0.25,0.25, height 0.25
TRANS_NexFET_Q5A [mm]
  rect 0.8x0.7 smd paste-0.387: 1(-2.752,2.055) 2(-2.752,0.685) 3(-2.752,-0.685) 4(-2.752,-2.055) 5(2.752,-2.055) 6(2.752,-0.685) 7(2.752,0.685) 8(2.752,2.055)
  rect 4.3x4.56 smd paste-2.267 mask+0.025: 9(0.3,0)
  silkscreen extent -4.22,1.98 -4.07,2.13, body extent 0,0 0.25,0.25, height 0.25
VQFN_76RHFT_TEX [mil]
  rect 32x10 smd paste+0 mask+0: 1(-76.5,68.92) 2(-76.5,49.23) 3(-76.5,29.54) 4(-76.5,9.85) 5(-76.5,-9.84) 6(-76.5,-29.53) 7(-76.5,-49.22) 8(-76.5,-68.91) 15(76.5,-68.91) 16(76.5,-49.22) 17(76.5,-29.53) 18(76.5,-9.84) 19(76.5,9.85) 20(76.5,29.54) 21(76.5,49.23) 22(76.5,68.92)
  rect 10x32 smd paste+0 mask+0: 9(-49.22,-96.5) 10(-29.53,-96.5) 11(-9.84,-96.5) 12(9.85,-96.5) 13(29.54,-96.5) 14(49.23,-96.5) 23(49.23,96.5) 24(29.54,96.5) 25(9.85,96.5) 26(-9.84,96.5) 27(-29.53,96.5) 28(-49.22,96.5)
  rect 104x144 smd paste-71.5 mask+0: 29(0,0)
  silkscreen extent -86,-132 112,106, body extent -81,-101 81,101, height 65
XT90 [mm]
  round 9.5 hole 6.2: 1(0,0) 2(11.176,0)
  silkscreen extent -4.99,-5.21 16.42,5.21, body extent -4.99,-5.5 16.41,5.5, height 20.7

## Part data
C1 C8 C9: library part CMP-1035-02595-1, "CAP 100nF 100V ±10% 0603 (1608 Metric) Thickness 1mm SMD", Case-EIA=0603, Case-Metric=1608, Rated Voltage="100 V", Tolerance=Â±10%, Max Thickness="1 mm", Technology=SMT
C2 C3 C5 C10 C11 C12 C13 C16 C17: library part CMP-1037-04922-1, "CAP 4.7uF 35V ±10% 1206 (3216 Metric) Thickness 1.9mm SMD", Case-EIA=1206, Case-Metric=3216, Rated Voltage="35 V", Tolerance=Â±10%, Max Thickness="1.9 mm", Technology=SMT
  C5 C16 C17: Supplier 1=Digi-Key
C4: library part CMP-1035-01189-1, "CAP 75pF 25V ±1% 0603 (1608 Metric) Thickness 1mm SMD", Case-EIA=0603, Case-Metric=1608, Rated Voltage="25 V", Tolerance=Â±1%, Max Thickness="1 mm", Technology=SMT
C6 C18 C19: library part CMP-1037-05003-1, "CAP 47uF 16V ±20% 1206 (3216 Metric) Thickness 1.9mm SMD", Case-EIA=1206, Case-Metric=3216, Rated Voltage="16 V", Tolerance=Â±20%, Max Thickness="1.9 mm", Technology=SMT
C7 C20 C21: library part CMP-1035-02740-1, "CAP 1uF 25V ±10% 0603 (1608 Metric) Thickness 1mm SMD", Case-EIA=0603, Case-Metric=1608, Rated Voltage="25 V", Tolerance=Â±10%, Max Thickness="1 mm", Technology=SMT
C14 C15: library part CMP-1035-00915-1, "CAP 30pF 50V ±10% 0603 (1608 Metric) Thickness 1mm SMD", Case-EIA=0603, Case-Metric=1608, Rated Voltage="50 V", Tolerance=Â±10%, Max Thickness="1 mm", Technology=SMT
Cbias1 Cbias2 Cboot1 Cboot2 Cboot3 Cboot4 Ccs1 Ccs2: Manufacturer Name=AVX
  Cbias1 Cbias2: Manufacturer Part Number=08053C104KAT2A, PackageReference=08053C104KAT2A
  Cboot1 Cboot2 Cboot3 Cboot4: Manufacturer Part Number=06033C104KAT2A, PackageReference=06033C104KAT2A
  Ccs1 Ccs2: Manufacturer Part Number=06035A470JAT2A, PackageReference=06035A470JAT2A
Cbulk1 Cbulk2 Cbulk_1 Cbulk_2 Cbulk_3 Cbulk_4 Cbulk_5 Cbulk_6 Cbulk_7 Cbulk_8 Cin_2 Cout1 Cout2 Cout_1 Cout_2: Manufacturer Name=Panasonic
  Cbulk1 Cbulk2 Cbulk_1 Cbulk_2 Cbulk_3 Cbulk_4 Cbulk_5 Cbulk_6 Cbulk_7 Cbulk_8: Manufacturer Part Number=100SXV15M, PackageReference=100SXV15M
  Cin_2: Manufacturer Part Number=EEHZA1K330P, PackageReference=EEHZA1K330P
  Cout1 Cout2 Cout_1 Cout_2: Manufacturer Part Number=16SVPF82M, PackageReference=16SVPF82M
Ccomp1 Ccomp3 Css1 Css2: Manufacturer Name=Kemet
  Ccomp1 Ccomp3: Manufacturer Part Number=C0805C181K5GACTU, PackageReference=C0805C181K5GACTU
  Css1 Css2: Manufacturer Part Number=C0603C153J3GACTU, PackageReference=C0603C153J3GACTU
Ccomp2 Ccomp4 Ccomp_1 Ccomp_2: "CGA2B3X7R1H103K0", Manufacturer Name=TDK, Manufacturer Part Number=CGA2B3X7R1H103K050BB, PackageReference=CGA2B3X7R1H103K050BB
Cf1 Cf2: "CGA3E2X7R1H104K0", Manufacturer Name=TDK, Manufacturer Part Number=CGA3E2X7R1H104K080AA, PackageReference=CGA3E2X7R1H104K080AA
Cin1 Cin_1: "No Description Available", Manufacturer_Name=Panasonic, Cap=3.3E-5, Copyright="Copyright (C) 2018 Accelerated Designs. All rights reserved", Datasheet_URL=http://industrial.panasonic.com/www%2Ddata/pdf/ABA0000/ABA0000CE136.pdf, ESR=0.036, IRMS=1.7, Manufacturer_Part_Number=EEHZA1K330P, RefDes=RefDes, Type=DEV, VDC=80.0, Vendor=Panasonic
Cin2: library part EEHZA1K330P, "EEHZA1K330P", Manufacturer Name=Panasonic, Manufacturer Part Number=EEHZA1K330P, PackageReference=EEHZA1K330P
Coutx1 Coutx2 Coutx3 Coutx4 Coutx5 Coutx6: "C2012X5R1V226M12", Manufacturer Name=TDK, Manufacturer Part Number=C2012X5R1V226M125AC, PackageReference=C2012X5R1V226M125AC
Cslope1 Cslope2: Manufacturer Name="Samsung Electro-Mechanics", Manufacturer Part Number=CL10C221JB8NNNC, PackageReference=CL10C221JB8NNNC
Cvcc1 Cvcc2: Manufacturer Name="Taiyo Yuden", Manufacturer Part Number=EMK107B7105KA-T, PackageReference=EMK107B7105KA-T
D1 D2 D3 D4 D5 D6 D7 D8: library part LED0, "led", Color=Green, Current - Test=20mA, Lens Color=Colorless, Manufacturer="Lite-On Inc.", Manufacturer Part Number=LTST-C171KGKT, Millicandela Rating=35mcd, Package / Case="0805 (2012 Metric)", Supplier Part Number 1=160-1426-1-ND, Voltage - Forward (Vf) (Typ)=2V, Category=Optoelectronics, ComponentLink1Description=http://optoelectronics.liteon.com/upload/download/DS22-2000-118/LTST-C171KGKT.pdf, ComponentLink1URL=http://optoelectronics.liteon.com/upload/download/DS22-2000-118/LTST-C171KGKT.pdf, Features=-, Height (Max)=0.90mm, Lens Style/Size="Rectangle with Flat Top, 1.40mm x 1.25mm", Lens Transparency=Clear, Mounting Type="Surface Mount", Packaging="Cut Tape (CT)", Part Status=Active, Pricing 1="1=0.31, 10=0.225, 25=0.1656, 100=0.1183, 250=0.0804, 500=0.07096, 1000=0.05558 (USD)", RoHS="RoHS Compliant", Size / Dimension="2.00mm L x 1.25mm W", Stock 1=350441, Supplier 1=Digi-Key, Viewing Angle=130°, Wavelength - Dominant=571nm, Wavelength - Peak=574nm
D9: Capacitance @ Vr, F=-, Current - Average Rectified (Io)=15A, Manufacturer="Diodes Incorporated", Operating Temperature - Junction="-65°C ~ 150°C", Package / Case="PowerDI™ 5", Supplier Device Package=PowerDI®5, Supplier Part Number 1=SBRT15U50SP5-13DICT-ND, Category="Discrete Semiconductor Products", ComponentLink1Description=https://media.digikey.com/pdf/Data%20Sheets/Diodes%20PDFs/SBRT15U50SP5.pdf, ComponentLink1URL=https://media.digikey.com/pdf/Data%20Sheets/Diodes%20PDFs/SBRT15U50SP5.pdf, Diode Type="Super Barrier", Manufacturer Part Number=SBRT15U50SP5-13, Mounting Type="Surface Mount", Packaging="Cut Tape (CT)", Part Status=Active, Pricing 1="1=0.93, 10=0.823, 100=0.6306, 500=0.49852, 1000=0.39882 (USD)", RoHS="RoHS Compliant", Speed="Fast Recovery =< 500ns, > 200mA (Io)", Stock 1=12134, Supplier 1=Digi-Key
D10: library part CMP-2000-07088-1, "Transient Voltage Suppression Diode, 30 V, -65 to 150 degC, 2-Pin SMD, RoHS, Tape and Reel", Capacitance @ Frequency=-, Current - Peak Pulse (10/1000µs)=8.3A, Manufacturer=Littelfuse-Inc., Operating Temperature=-55°C~150°C(TJ), Package / Case=DO-214AC,SMA, Package Description="2-Pin Surface Mount Device, Body 4.295 x 2.595 mm", Package Reference=DO-214AC, Power - Peak Pulse=400W, Power Line Protection=No, Supplier Device Package=DO-214AC(SMA), Voltage - Breakdown (Min)=33.3V, Voltage - Clamping (Max) @ Ipp=48.4V, Voltage - Reverse Standoff (Typ)=30V, Applications=GeneralPurpose, Bidirectional Channels=1, Category=CircuitProtection, Datasheet URL=http://www.littelfuse.com/~/media/electronics/datasheets/tvs_diodes/littelfuse_tvs_diode_smaj_datasheet.pdf.pdf, Datasheet Version=11/2015, Family=TVS-Diodes, Manufacturer URL=http://www.littelfuse.com/, Mounting Technology=SurfaceMount, Mounting Type=SurfaceMount, Packaging=Digi-Reel®, Series=SMAJ, Type=Zener, Unidirectional Channels=-
Dboot1 Dboot3: "CUSTOM1", Manufacturer Name=CUSTOM, Manufacturer Part Number=GENERIC_DIODE, PackageReference=CUSTOM
Dboot2 Dboot4: Manufacturer Name="Comchip Technology", Manufacturer Part Number=CDBK0520L-HF, PackageReference=CDBK0520L-HF
Df1 Df2: "CUSTOM2", Manufacturer Name=CUSTOM, Manufacturer Part Number=GENERIC_DIODE, PackageReference=CUSTOM
F1 F2 F3: library part "3588 Fuse Holder", "Keystone Electronics 3588", Supplier Part Number 1=36-3588-ND, Datasheet=http://keyelco.com/userAssets/file/M65p43.pdf, Supplier 1=Digi-Key
J J1: Package=None, Availability=Unavailable, MF=Samtec, MP=TSW-115-05-G-S, Price=None
L1 L5: Manufacturer Name=Bourns, Manufacturer Part Number=SRP1270-3R3M, PackageReference=SRP1270-3R3M
L2: library part SRP5030TA, DC Resistance (DCR)="76.2 mOhm Max", Manufacturer="Bourns Inc.", Manufacturer Part Number=SRP5030TA-6R8M, Operating Temperature="-40°C ~ 150°C", Package / Case=Nonstandard, Q @ Freq="15 @ 100kHz", Ratings=AEC-Q200, Supplier Device Package=-, Supplier Part Number 1=SRP5030TA-6R8MCT-ND, Tolerance=±20%, Category="Inductors, Coils, Chokes", ComponentLink1Description=http://www.bourns.com/docs/Product-Datasheets/SRP5030TA.pdf, ComponentLink1URL=http://www.bourns.com/docs/Product-Datasheets/SRP5030TA.pdf, Height - Seated (Max)="0.118\" (3.00mm)", Material - Core="Carbonyl Powder", Mounting Type="Surface Mount", Packaging="Cut Tape (CT)", Part Status=Active, Pricing 1="1=1.51, 10=1.397, 100=0.9781, 500=0.79178, 1000=0.72191 (USD)", RoHS="RoHS Compliant", Shielding=Shielded, Size / Dimension="0.224\" L x 0.205\" W (5.70mm x 5.20mm)", Stock 1=5626, Supplier 1=Digi-Key, Type=Wirewound
L3 L4: library part SRP5030TA_8R2, Supplier Part Number 1=SRP6540-8R2MCT-ND, ComponentLink1Description=http://www.bourns.com/docs/Product-Datasheets/SRP5030TA.pdf, ComponentLink1URL=http://www.bourns.com/docs/Product-Datasheets/SRP5030TA.pdf, Supplier 1=Digi-Key
M1 M2 M3 M5 M6 M7: Manufacturer Name="Texas Instruments"
  M1 M3 M5 M7: Manufacturer Part Number=CSD19534Q5A, PackageReference=CSD19534Q5A
  M2 M6: Manufacturer Part Number=CSD17303Q5, PackageReference=CSD17303Q5
M4 M8: "CSD17573Q5B- Note out of stock, double check available subs", Manufacturer Name="Texas Instruments", Manufacturer Part Number=CSD17573Q5B, PackageReference=CSD17573Q5B
MH1 MH2 MH3 MH4: library part "Mounting Hole #4-40, Loose Fit", "Mounting Hole for ANSI #4-40 w/ Flat Washer, Loose Fit", Datasheet=http://blogs.mentor.com/tom-hausherr/blog/tag/pcb-mounting-holes/
P1 P2: "NanoFit Right Hdr TH DR 14Ckt", Manufacturer=Molex, Part Number=105314-1214, Supplier Part Number=538-105314-1214, ComponentLink1Description="Mouser Link", ComponentLink1URL=https://www.mouser.com/ProductDetail/Molex/105314-1214?qs=PqFvFmEiOr6wLIXpvlvqbA%3D%3D, Supplier=Mouser, Supplier 1=Mouser, Supplier Part Number 1=538-105314-1214
Q Q1: "P-Channel 60V 18A _Tc_ 3.7W _Ta_, 88W _Tc_ Surface Mount D2PAK", Package="D2PAK Vishay", Availability=Unavailable, MF=Vishay, MP=IRF9Z34STRLPBF, Price=None, SnapEDA_Link=https://www.snapeda.com/parts/IRF9Z34STRLPBF/Vishay%20Siliconix/view-part/813693/?ref=snap
R1: library part CMP-1012-00703-1, "51K 0.1W 1% 0603 (1608 Metric)  SMD", Case-EIA=0603, Case-Metric=1608, Power="0.1 W", Tolerance="1 %", Technology=SMT
R2 R5 R6: library part CMP-1012-00660-1, "22K1 0.1W 1% 0603 (1608 Metric)  SMD", Case-EIA=0603, Case-Metric=1608, Power="0.1 W", Tolerance="1 %", Technology=SMT
R3 R4: library part CMP-1012-00730-1, "88K7 0.1W 1% 0603 (1608 Metric)  SMD", Case-EIA=0603, Case-Metric=1608, Power="0.1 W", Tolerance="1 %", Technology=SMT
R7 R8 R9: library part CMP-1012-00518-1, "1K2 0.1W 1% 0603 (1608 Metric)  SMD", Case-EIA=0603, Case-Metric=1608, Power="0.1 W", Tolerance="1 %", Technology=SMT
R10 R11: library part CMP-1012-00492-1, "681R 0.1W 1% 0603 (1608 Metric)  SMD", Case-EIA=0603, Case-Metric=1608, Power="0.1 W", Tolerance="1 %", Technology=SMT
R12 R13: library part CMP-1012-00058-1, "220R 0.1W 5% 0603 (1608 Metric)  SMD", Case-EIA=0603, Case-Metric=1608, Power="0.1 W", Tolerance="5 %", Technology=SMT
R14: library part CMP-1012-00050-1, "100R 0.1W 5% 0603 (1608 Metric)  SMD", Case-EIA=0603, Case-Metric=1608, Power="0.1 W", Tolerance="5 %", Technology=SMT
R15 R16: library part CMP-1012-00586-1, "4K7 0.1W 1% 0603 (1608 Metric)  SMD", Case-EIA=0603, Case-Metric=1608, Power="0.1 W", Tolerance="1 %", Technology=SMT
R19: library part CMP-2001-03976-2, "RES Thick Film, 4.7MΩ, 1%, 0.125W, 100ppm/°C, 0805", Case Code (Imperial)=0805, Case Code (Metric)=2012, Max Operating Temperature=155°C, Min Operating Temperature=-55°C, Package Quantity=5000, Power Rating=125mW, Resistance=4.7MR, Temperature Coefficient=100ppm/°C, Tolerance=1%, Voltage Rating=150V, Case/Package=0805, Composition="Thick Film", Contact Plating=Tin, Depth=1.25mm, Height=0.45mm, Lead Free="Lead Free", Length=2mm, Military Standard=Not, Number of Pins=2, Packaging="Tape and Reel", Radiation Hardening=No, Termination=SMD/SMT, Voltage Rating (DC)=150V, Weight=0.000194oz, Width=1.25mm
R20: library part CMP-2001-03781-2, "RES Thick Film, 2MΩ, 1%, 0.125W, 100ppm/°C, 0805", Case Code (Imperial)=0805, Case Code (Metric)=2012, Max Operating Temperature=155°C, Max Power Dissipation=125mW, Min Operating Temperature=-55°C, Package Quantity=10, Resistance=2MR, Temperature Coefficient=100ppm/°C, Tolerance=1%, Voltage Rating=150V, Case/Package=0805, Composition="Thick Film", Contact Plating=Tin, Depth=1.25mm, Features="Automotive AEC-Q200", Height=0.45mm, Lead Free="Lead Free", Length=2mm, Military Standard=Not, Mount="Surface Mount", Number of Pins=2, Number of Terminations=2, Packaging="Tape and Reel", Power Rating=125mW, Radiation Hardening=No, Termination=SMD/SMT, Voltage Rating (DC)=150V, Weight=0.000194oz, Width=0.049inch
Rcomp1 Rcomp2 Rcsg1 Rcsg2 Rcsp1 Rcsp2 Rfbt1 Rfbt2 Rsense1 Rsense2 Rt1 Rt2 Ruvb1 Ruvb2 Ruvt1 Ruvt2 Rvisns1 Rvisns2: Manufacturer Name=Vishay-Dale
  Rcomp1 Rcomp2: Manufacturer Part Number=CRCW040212K7FKED, PackageReference=CRCW040212K7FKED
  Rcsg1 Rcsg2 Rcsp1 Rcsp2: Manufacturer Part Number=CRCW0603100RFKEA, PackageReference=CRCW0603100RFKEA
  Rfbt1 Rfbt2: Manufacturer Part Number=CRCW0603280KFKEA, PackageReference=CRCW0603280KFKEA
  Rsense1 Rsense2: Manufacturer Part Number=WSR37L000FEA, PackageReference=WSR37L000FEA
  Rt1 Rt2: Manufacturer Part Number=CRCW040223K2FKED, PackageReference=CRCW040223K2FKED
  Ruvb1 Ruvb2: Manufacturer Part Number=CRCW040271K5FKED, PackageReference=CRCW040271K5FKED
  Ruvt1 Ruvt2: Manufacturer Part Number=CRCW0402249KFKED, PackageReference=CRCW0402249KFKED
  Rvisns1 Rvisns2: Manufacturer Part Number=CRCW06032K00FKEA, PackageReference=CRCW06032K00FKEA
Rf1 Rf2 Rfbb1 Rfbb2 Rfbb? Rmode1 Rmode2 Rpg1 Rpg2: Manufacturer Name=Yageo
  Rf1 Rf2: Manufacturer Part Number=RC0603FR-0710RL, PackageReference=RC0603FR-0710RL
  Rfbb1 Rfbb2 Rfbb?: Manufacturer Part Number=RC0603FR-0720KL, PackageReference=RC0603FR-0720KL
  Rmode1 Rmode2: Manufacturer Part Number=RC0603FR-0793K1L, PackageReference=RC0603FR-0793K1L
  Rpg1 Rpg2: Manufacturer Part Number=RC0603FR-0710KL, PackageReference=RC0603FR-0710KL
TP1 TP2 TP3 TP4 TP5 TP6 TP7 TP8 TP9 TP10 TP11: "Keyston Electronics 5001 Test Point Loop", Color=Black, Manufacturer="Keystone Electronics", Manufacturer P/N=5001, Supplier Part Number 1=36-5001-ND, Supplier 1=Digi-Key
U1 U5: "No Description Available", Mfr_Name="Texas Instruments", Copyright="Copyright (C) 2022 Ultra Librarian. All rights reserved.", Digi-Key_Part_Number_1=296-LM5176RHFTTR-ND, Digi-Key_Part_Number_2=296-LM5176RHFTCT-ND, Digi-Key_Part_Number_3=296-LM5176RHFTDKR-ND, Manufacturer_Part_Number=LM5176RHFT, RefDes=RefDes, Type=DEV
U2 U3 U4: Current - Output=3A, Frequency - Switching=400kHz, Manufacturer="Texas Instruments", Manufacturer Part Number=LMR23630AFQDDARQ1, Operating Temperature="-40°C ~ 125°C (TJ)", Package / Case="8-SOIC (0.154\", 3.90mm Width) Exposed Pad", Supplier Device Package="8-SO PowerPad", Supplier Part Number 1=296-45260-6-ND, Voltage - Input (Max)=36V, Voltage - Input (Min)=4.5V, Voltage - Output (Max)=28V, Voltage - Output (Min/Fixed)=1V, Category="Integrated Circuits (ICs)", ComponentLink1Description=http://www.ti.com/lit/ds/symlink/lmr23630-q1.pdf, ComponentLink1URL=http://www.ti.com/lit/ds/symlink/lmr23630-q1.pdf, Function=Step-Down, Mounting Type="Surface Mount", Number of Outputs=1, Output Configuration=Positive, Output Type=Adjustable, Packaging=Digi-Reel®, Part Status=Active, Pricing 1="1=3.97, 10=3.564, 100=2.9204, 500=2.48604, 1000=2.09667 (USD)", RoHS="RoHS Compliant", Stock 1=1636, Supplier 1=Digi-Key, Synchronous Rectifier=Yes, Topology=Buck

## Via types
v1: diameter 30, hole 15, 1-Top to 6-Bottom, 47 vias
v2: diameter 20, hole 10, 1-Top to 6-Bottom, tented top, 18 vias

## Nets (pads, with @x,y where several pads share a name; then routed paths per layer and width w, separated by ;. In a path a pad name is that pad's centre, name@x,y a point inside that pad or via, vN(x,y) a via of type N, cw(c..) or ccw(c..) an arc to the next point about the centre after c; other vN are vias at no path point)
11: Cboot4.2 L5.2 M6.1 M6.2 M6.3 M8.5 M8.6 M8.7 M8.8 M8.9 U5.15
11_0: Cboot2.2 L1.2 M2.1 M2.2 M2.3 M4.5 M4.6 M4.7 M4.8 M4.9 U1.15
15: M7.1 M7.2 M7.3 M8.1 M8.2 M8.3 Rcsp2.2 Rsense2.1
15_0: M3.1 M3.2 M3.3 M4.1 M4.2 M4.3 Rcsp1.2 Rsense1.1
26: Cboot3.2 L5.1 M5.1 M5.2 M5.3 M7.5 M7.6 M7.7 M7.8 M7.9 U5.25
26_0: Cboot1.2 L1.1 M1.1 M1.2 M1.3 M3.5 M3.6 M3.7 M3.8 M3.9 U1.25
27: M8.4 U5.18
27_0: M4.4 U1.18
32: M7.4 U5.22
32_0: M3.4 U1.22
33: M5.4 U5.24
33_0: M1.4 U1.24
34: M6.4 U5.16
34_0: M2.4 U1.16
Ard_3V3: J.02
Ard_5V: J.12
Ard_A0: J.04
Ard_A1: J.05
Ard_A2: J.06
Ard_A3: J.07
Ard_A4/SDA: J.08 P1.13 TP8.1
Ard_A5/SCL: J.09 P1.6 TP7.1
Ard_A6: J.10
Ard_A7: J.11 R19.2 R20.2
Ard_D0/RX: J1.14
Ard_D1/TX: J1.15
Ard_D2: J1.11
Ard_D3: J1.10
Ard_D4: J1.09
Ard_D5: J1.08
Ard_D6: J1.07
Ard_D7: J1.06
Ard_D8: J1.05
Ard_D9: J1.04
Ard_D10: J1.03
Ard_D11: J1.02
Ard_D12: J1.01
Ard_D13: J.01
Ard_RESET: J1.13 J.13
GND: C2.1 C3.1 C5.1 C6.1 C7.1 C10.1 C11.1 C12.1 C13.1 C16.1 C17.1 C18.1 C19.1 C20.1 C21.1 Cbias1.2 Cbias2.2 Cbulk1.2 Cbulk2.2 Cbulk_1.2 Cbulk_2.2 Cbulk_3.2 Cbulk_4.2 Cbulk_5.2 Cbulk_6.2 Cbulk_7.2 Cbulk_8.2 Ccomp1.2 Ccomp3.2 Cf1.2 Cf2.2 Cin1.2 Cin2.2 Cin_1.2 Cin_2.2 Cout1.2 Cout2.2 Cout_1.2 Cout_2.2 Coutx1.2 Coutx2.2 Coutx3.2 Coutx4.2 Coutx5.2 Coutx6.2 Cslope1.2 Cslope2.2 Css1.2 Css2.2 Cvcc1.2 Cvcc2.2 D1.1 D2.1 D3.1 D4.1 D5.1 D6.1 D7.1 D8.1 D10.2 J1.12 MH1.0 MH2.0 MH3.0 MH4.0 P1.7 P1.8 P1.9 P1.12 P1.14 P2.8 P2.9 P2.10 P2.11 P2.12 P2.13 P2.14 P3.1 R2.1 R5.1 R6.1 R20.1 Rcomp1.2 Rcomp2.2 Rcsg1.2 Rcsg2.2 Rfbb1.2 Rfbb2.2 Rfbb?.2 Rmode1.2 Rmode2.2 Rsense1.2 Rsense2.2 Rt1.2 Rt2.2 Ruvb1.2 Ruvb2.2 TP1.1 TP3.1 U1.2 U1.7 U1.10 U1.11 U1.19 U1.29 U2.6 U2.8 U2.9 U3.6 U3.8 U3.9 U4.6 U4.8 U4.9 U5.2 U5.7 U5.10 U5.11 U5.19 U5.29 | length 1105.6
  1-Top w10: R5.1 v1(4540,4450) ; C20.1 4705,4435 4715,4445 4795,4445 v1(4820,4420) ; R2.1 v1(5805,4465) ; R6.1 v1(5830,5405) ; C7.1 5970,4445 5980,4455 6070,4455 v1(6090,4435) ; C21.1 5995,5385 6010,5400 6085,5400 v1(6120,5365) ; U2.8 6102.28,4067.72 6135.12,4034.88 C3.1 C2.1 ; v1(6410,4180) C6.1 C5.1 ; v1(6435,5075) C17.1
  other v1: 6140,4015 4885,4070 4845,4100 6095,4125 5150,4150 6170,4995 6125,5025
  other v2: 4682.76,4129.41 4730,4129.41 4773.31,4129.41 5942.76,4149.41 5990,4149.41 6033.31,4149.41 4682.76,4180.59 4730,4180.59 4773.31,4180.59 5942.76,4200.59 5990,4200.59 6033.31,4200.59 5967.76,5064.41 6015,5064.41 6058.31,5064.41 5967.76,5115.59 6015,5115.59 6058.31,5115.59
NetC1_1: C1.1 L2.1 U2.1 | length 156.2
  1-Top w10: C1.1 6023.94,4417.56 6065,4376.5 U2.1
NetC1_2: C1.2 U2.2 | length 82.2
  1-Top w10: U2.2 6015,4357.44 C1.2
NetC4_1: C4.1 R1.1 R2.2 U2.4 | length 192
  1-Top w10: R2.2 R1.1 C4.1 U2.4 U2.4@5913.72,4283.56
NetC4_2: C4.2 C5.2 C6.2 F1.1 L2.2 R1.2 | length 477.5
  1-Top w10: R1.2 C4.2 5915,4450 5940,4475 6210,4475 6230,4455 L2.2
NetC7_2: C7.2 U2.3 | length 82.2
  1-Top w10: U2.3 5965,4357.44 C7.2
NetC8_1: C8.1 L3.1 U3.1 | length 161.2
  1-Top w10: C8.1 4763.94,4402.56 4805,4361.49 U3.1
NetC8_2: C8.2 U3.2 | length 87.2
  1-Top w10: U3.2 4755,4342.44 C8.2
NetC9_1: C9.1 L4.1 U4.1 | length 183.3
  1-Top w10: C9.1 6053.94,5357.56 6095,5316.49 6095,5202.28 U4.1
NetC9_2: C9.2 U4.2 | length 110
  1-Top w10: U4.2 6040,5293.66 6048.78,5302.44 C9.2
NetC14_1: C14.1 R3.1 R5.2 U3.4 | length 197.2
  1-Top w10: R5.2 R3.1 C14.1 4655,4342.44 U3.4
NetC14_2: C14.2 C16.2 C18.2 F2.1 L3.2 R3.2 | length 514.1
  1-Top w10: R3.2 C14.2 4650,4435 4690,4475 4930,4475 4965,4440 4965,4373.58 L3.2
NetC15_1: C15.1 R4.1 R6.2 U4.4 | length 215.2
  1-Top w10: R6.2 R4.1 C15.1 U4.4
NetC15_2: C15.2 C17.2 C19.2 F3.1 L4.2 R4.2 | length 533.7
  1-Top w10: R4.2 C15.2 5940,5390 5975,5425 6235,5425 6260,5400 L4.2
NetC20_2: C20.2 U3.3 | length 85.2
  1-Top w10: U3.3 C20.2
NetC21_2: C21.2 U4.3 | length 107.2
  1-Top w10: U4.3 5990,5297.44 C21.2
NetCbias1_1: Cbias1.1 U1.21
NetCbias2_1: Cbias2.1 U5.21
NetCboot1_1: Cboot1.1 Dboot1.1 U1.23
NetCboot2_1: Cboot2.1 Dboot2.1 U1.17
NetCboot3_1: Cboot3.1 Dboot3.1 U5.23
NetCboot4_1: Cboot4.1 Dboot4.1 U5.17
NetCcomp1_1: Ccomp1.1 Ccomp2.1 Ccomp_1.1 U1.6
NetCcomp2_2: Ccomp2.2 Ccomp_1.2 Rcomp1.1
NetCcomp3_1: Ccomp3.1 Ccomp4.1 Ccomp_2.1 U5.6
NetCcomp4_2: Ccomp4.2 Ccomp_2.2 Rcomp2.1
NetCcs1_1: Ccs1.1 Rcsp1.1 U1.13
NetCcs1_2: Ccs1.2 Rcsg1.1 U1.12
NetCcs2_1: Ccs2.1 Rcsp2.1 U5.13
NetCcs2_2: Ccs2.2 Rcsg2.1 U5.12
NetCf1_1: Cf1.1 Rf1.2 U1.27
NetCf2_1: Cf2.1 Rf2.2 U5.27
NetCslope1_1: Cslope1.1 U1.4
NetCslope2_1: Cslope2.1 U5.4
NetCss1_1: Css1.1 U1.5
NetCss2_1: Css2.1 U5.5
NetCvcc1_1: Cvcc1.1 Dboot1.2 Dboot2.2 Rpg1.1 U1.20
NetCvcc2_1: Cvcc2.1 Dboot3.2 Dboot4.2 Rpg2.1 U5.20
NetD1_2: D1.2 R7.1
NetD2_2: D2.2 R8.1
NetD3_2: D3.2 R9.1
NetD4_2: D4.2 R10.1
NetD5_2: D5.2 R11.1
NetD6_2: D6.2 R12.1
NetD7_2: D7.2 R13.1
NetD8_2: D8.2 R14.1
NetD9_2: D9.2 Q1.3 Q.3 R15.2 R16.2 | length 116
  6-Bottom w20: R15.2 4360,4867.56 v1(4360,4755)
  other v1: 4085,4710
NetDf1_1: Df1.1 Rf1.1
NetDf2_1: Df2.1 Rf2.1
NetP1_5: P1.5 Q1.1 Q.1 R15.1 R16.1 | length 3908.2
  1-Top w20: v1(4140,4710) 4140,4690 4160.03,4669.97 4170,4660 Q.1 ; Q1.1 4275,4810 4305,4780 v1(4305,4755)
  3-Signal1 w20: v1(4140,4710) 4179.75,4749.75 4179.75,4764.75 4221.56,4806.56 4253.44,4806.56 4438.46,4621.54 6828.46,4621.54 7025,4425 7025,4195.94 P1.5
  6-Bottom w20: R15.1 4305,4867.44 v1(4305,4755)
NetP1_10: P1.10
NetP1_11: P1.11
NetRfbb1_1: Rfbb1.1 Rfbt1.2 U1.8
NetRfbb2_1: Rfbb2.1 Rfbb?.1 Rfbt2.2 U5.8
NetRmode1_1: Rmode1.1 U1.1
NetRmode2_1: Rmode2.1 U5.1
NetRpg1_2: Rpg1.2 U1.14
NetRpg2_2: Rpg2.2 U5.14
NetRt1_1: Rt1.1 U1.3
NetRt2_1: Rt2.1 U5.3
NetRuvb1_1: Ruvb1.1 Ruvt1.2 U1.26
NetRuvb2_1: Ruvb2.1 Ruvt2.2 U5.26
NetRvisns1_1: Rvisns1.1 U1.28
NetRvisns2_1: Rvisns2.1 U5.28
V3P3: F1.2 P1.3 P1.4 P2.7 R14.2 TP11.1
V5P0: F3.2 P2.3 P2.4 R12.2 TP9.1
V5P0_Servo: F2.2 P2.5 R13.2 TP10.1
V12P0: Cout2.1 Cout_2.1 Coutx4.1 Coutx5.1 Coutx6.1 J.15 M6.5 M6.6 M6.7 M6.8 M6.9 P2.1 P2.2 R11.2 Rfbt2.1 TP6.1 U5.9
V12P0_Jetson: Cout1.1 Cout_1.1 Coutx1.1 Coutx2.1 Coutx3.1 M2.5 M2.6 M2.7 M2.8 M2.9 P2.6 R10.2 Rfbt1.1 TP5.1 U1.9
VBAT: D9.1 D10.1 P3.2 R19.1
VBAT_EXT: R7.2
VBAT_THRUSTERS: P1.2 R9.2 TP4.1
VBATT: Cbulk1.1 Cbulk2.1 Cbulk_1.1 Cbulk_2.1 Cbulk_3.1 Cbulk_4.1 Cbulk_5.1 Cbulk_6.1 Cbulk_7.1 Cbulk_8.1 Cin1.1 Cin2.1 Cin_1.1 Cin_2.1 Df1.2 Df2.2 M1.5 M1.6 M1.7 M1.8 M1.9 M5.5 M5.6 M5.7 M5.8 M5.9 Ruvt1.1 Ruvt2.1 Rvisns1.2 Rvisns2.2
VCC_BATT_FILT: C2.2 C3.2 C10.2 C11.2 C12.2 C13.2 P1.1 Q1.4 Q.4 R8.2 TP2.1 U2.5 U2.7 U3.5 U3.7 U4.5 U4.7
  other v1: 3935,3910 3990,3910 4045,3910 4100,3910 4155,3910 4210,3910 4265,3910 3935,3965 3990,3965 4045,3965 4100,3965 4155,3965 4210,3965 4265,3965 4595,5045 4650,5045 4595,5100 4650,5100 4595,5155 4650,5155 4595,5210 4650,5210 4595,5265 4650,5265 4595,5320 4650,5320 4595,5375 4650,5375
pads on no net: J.03 J.14 P1. P2.
copper on no net: | length 1.8
  1-Top w10: 7878.72,9238.56 7880,9237.28

## Polygon pours and split planes (outlines as drawn)
NetD9_2 on 1-Top "NETD9_2_L01_P014" (solid, pour order 14): 4020,5010 4020,5170 3840,5350 3450,5350 3425,5325 3425,5150 3440,5135 3780,5135 3825,5090 3825,4665 3935,4555 4360,4555 4480,4675 4480,4900 4420,4960 4070,4960
VCC_BATT_FILT on 1-Top "VCC_BATT_FILT_L01_P016" (solid, pour order 16): 4345,4450 4315,4480 3915,4480 3885,4450 3885,3895 3925,3855 4300,3855 4345,3900
VCC_BATT_FILT on 1-Top "VCC_BATT_FILT_L01_P015" (solid, pour order 15): 4105,5410 4080,5385 4080,5025 4110,4995 4665,4995 4705,5035 4705,5375 4670,5410